# Altium PCB Dev Board.PcbDoc (part 1 of 2)
Units mm, origin at the board's own origin, x right, y up, seen from the top; angles counter-clockwise.
Board outline 100 x 100 mm, 4 copper layers (Top Layer, GND, 3V3, Bottom Layer), stack 0.603 mm thick; 110 components, 66 nets, 337 pads, 152 vias.
Unrouted connection lines stored in the file: 23.
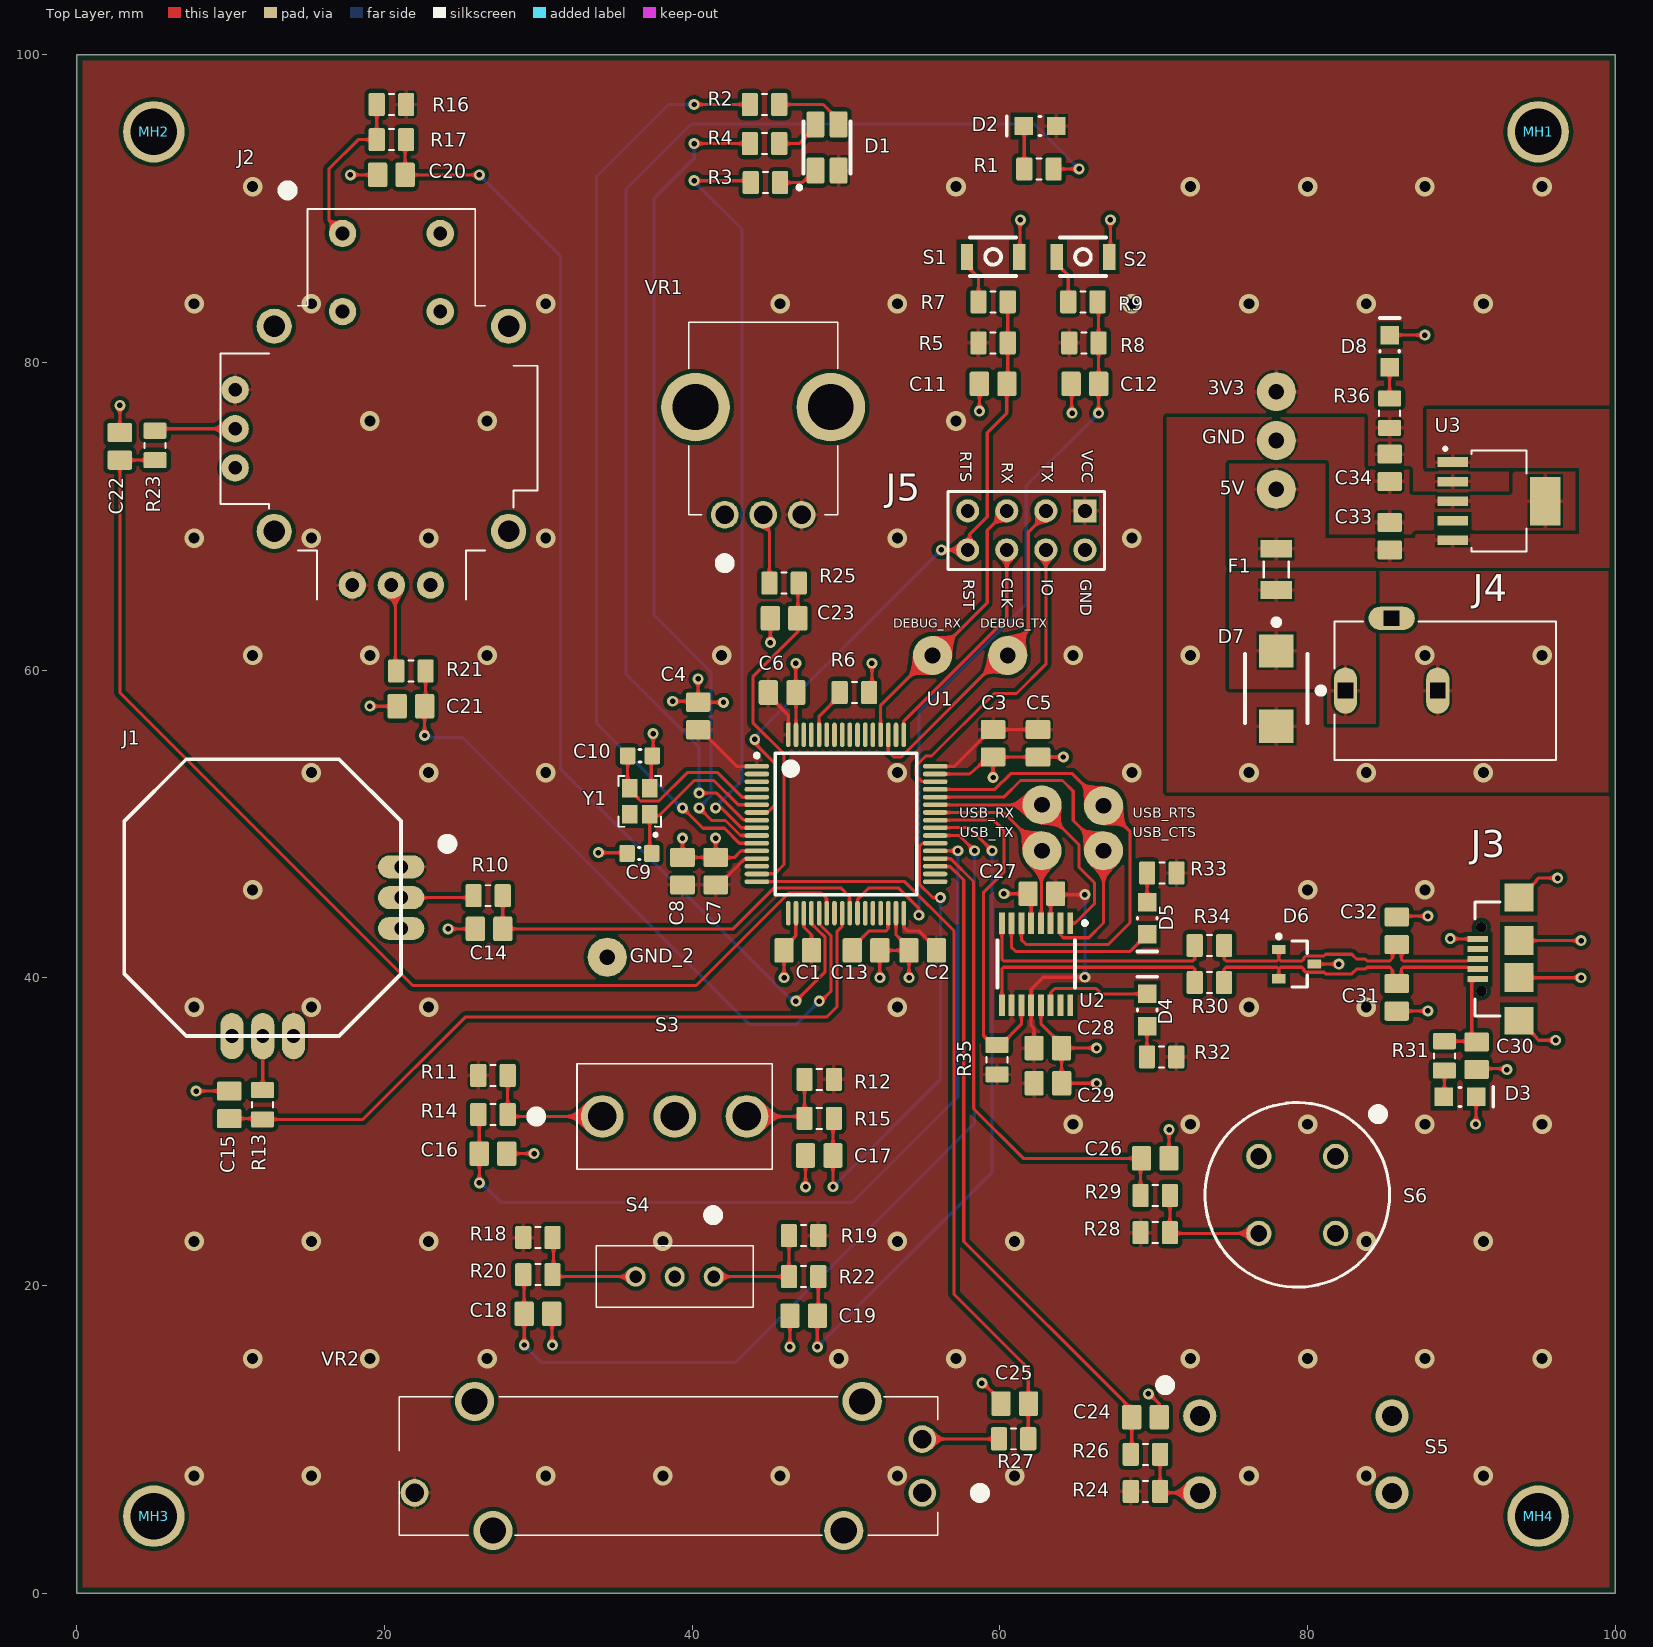
[diagram p0: Top Layer view]
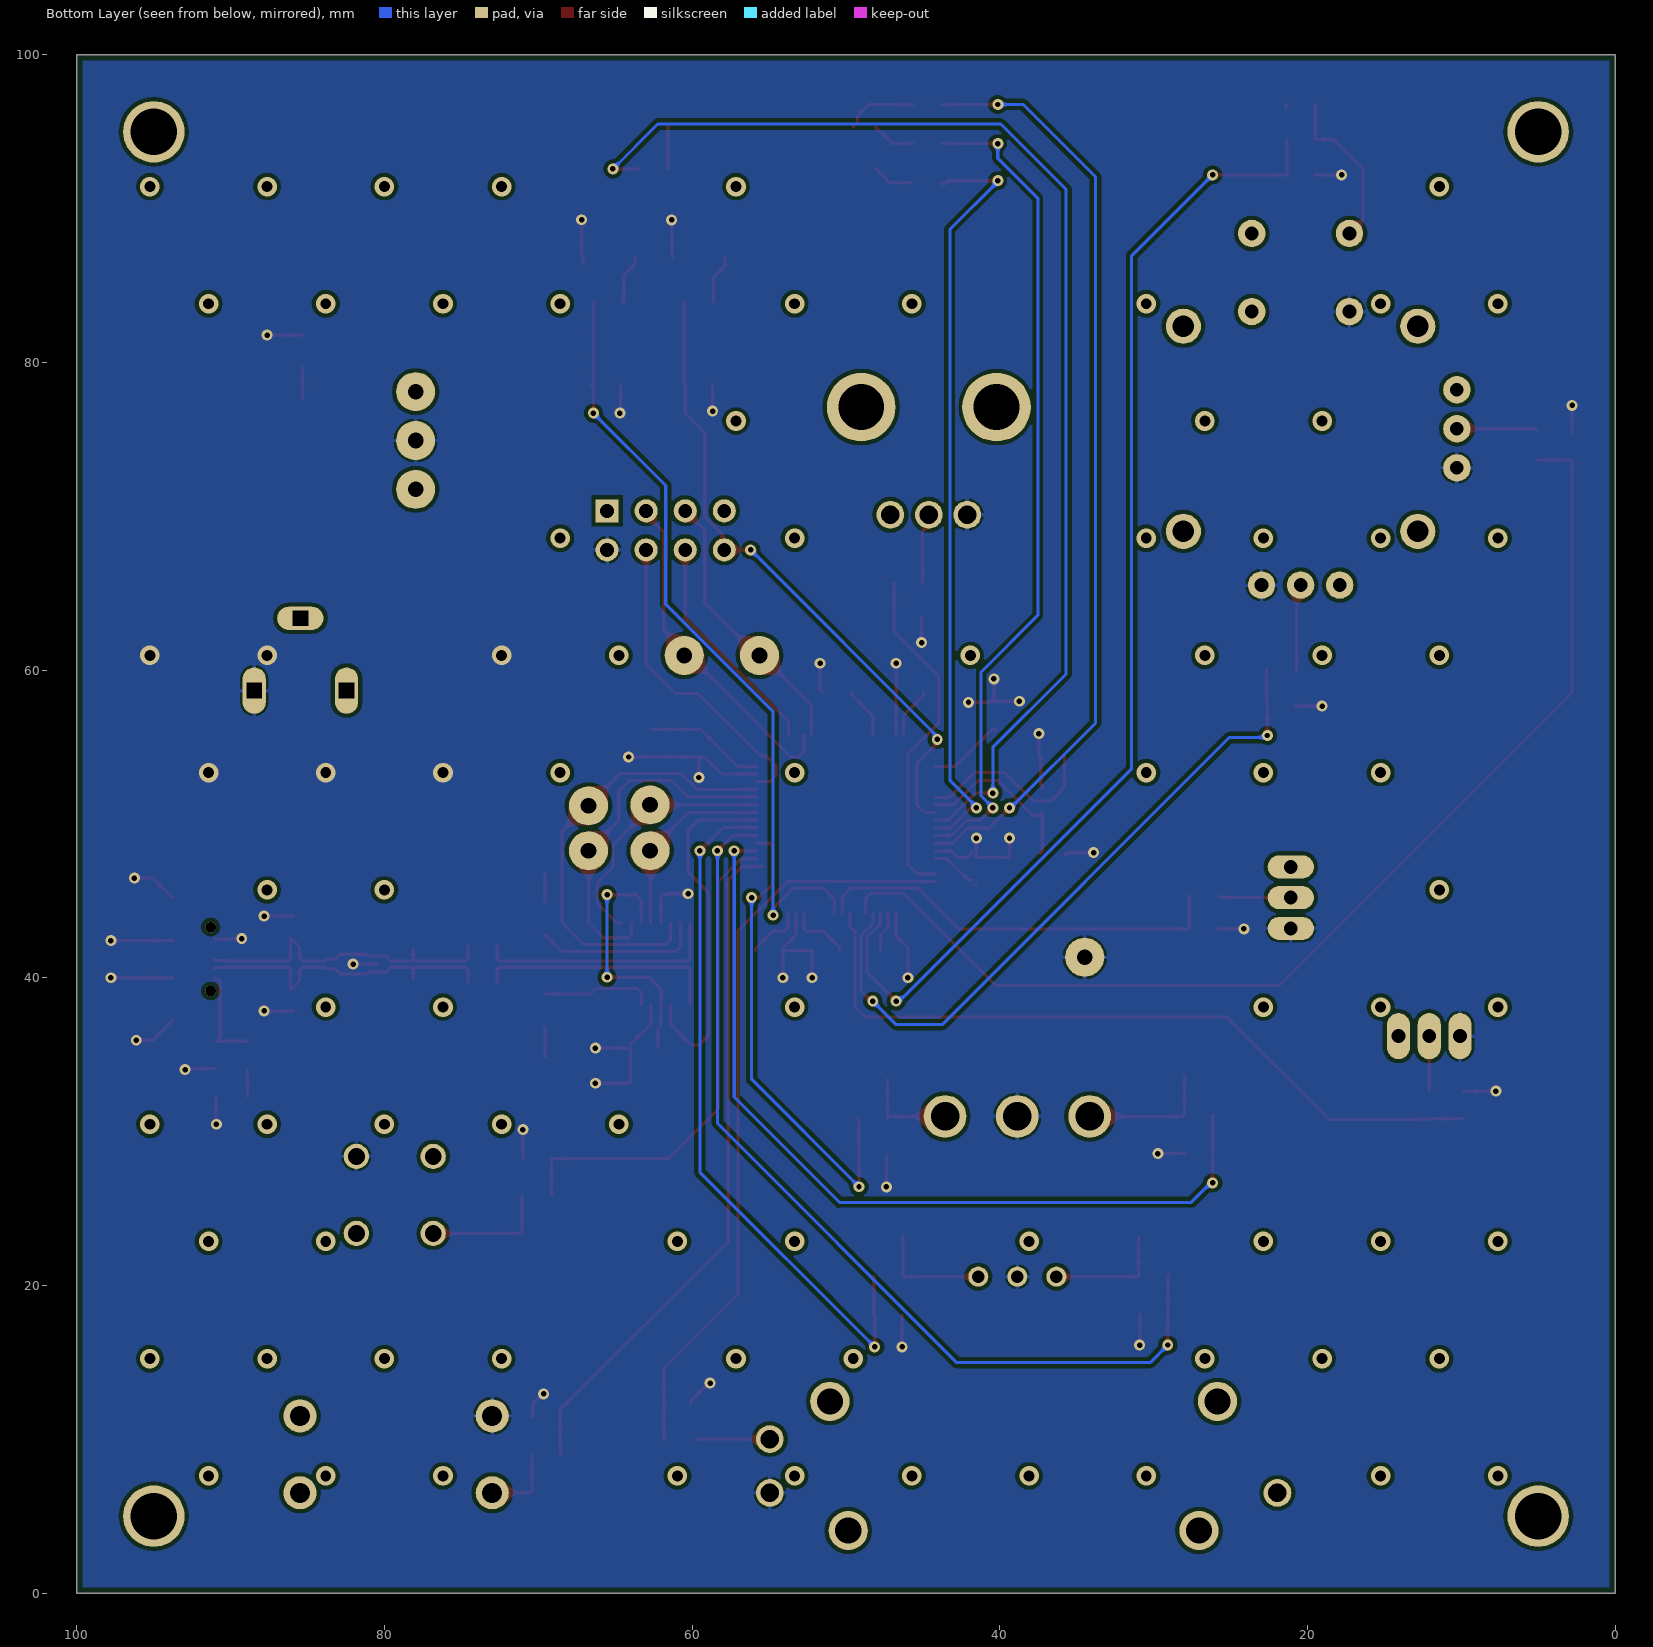
[diagram p1: Bottom Layer view, seen from below]
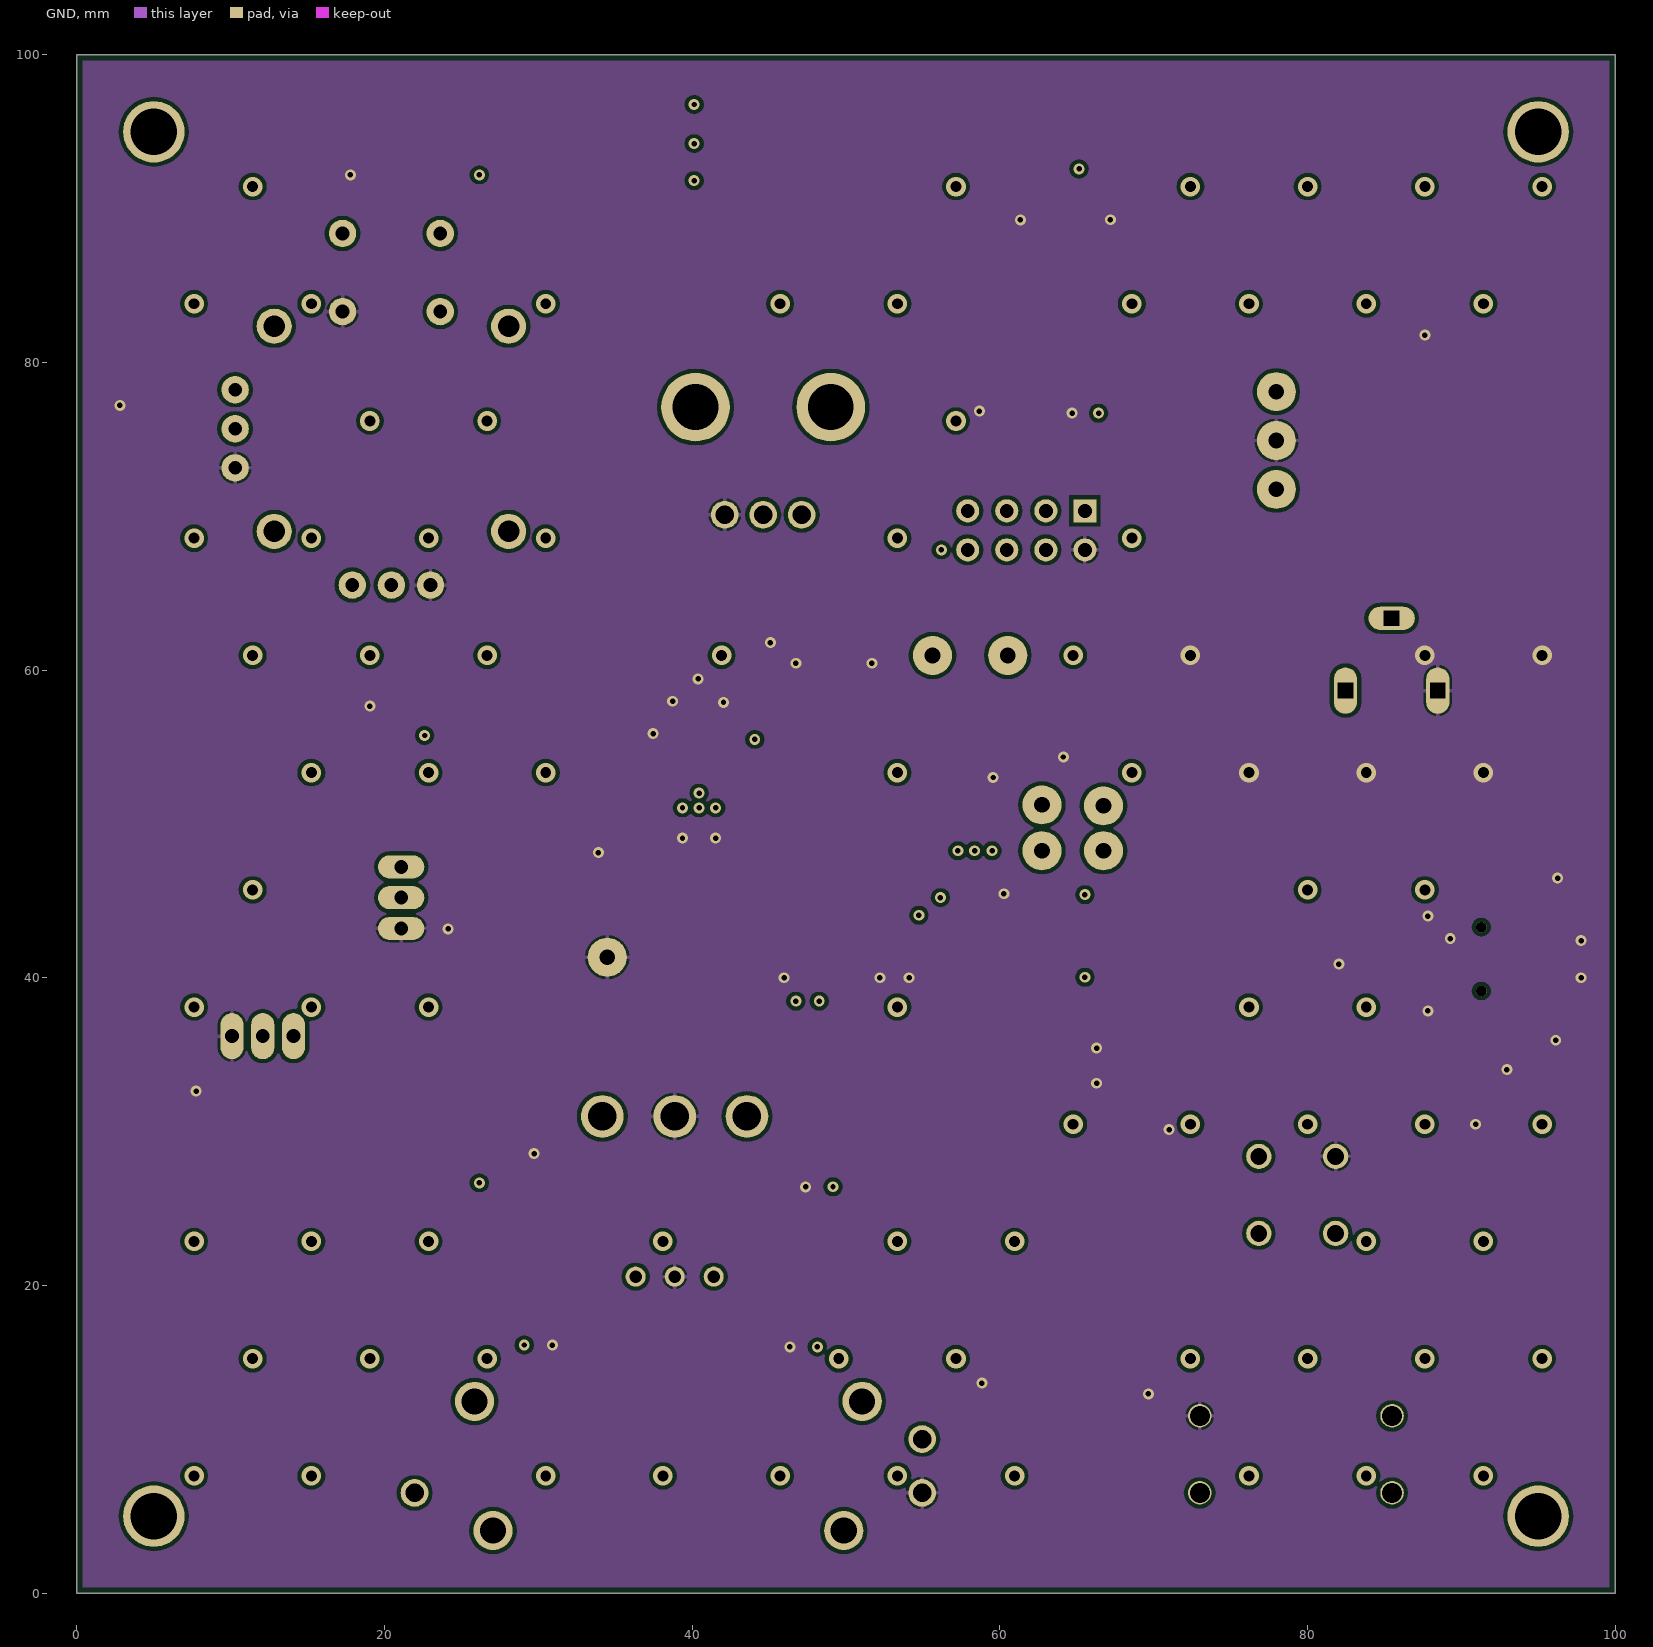
[diagram p2: GND]
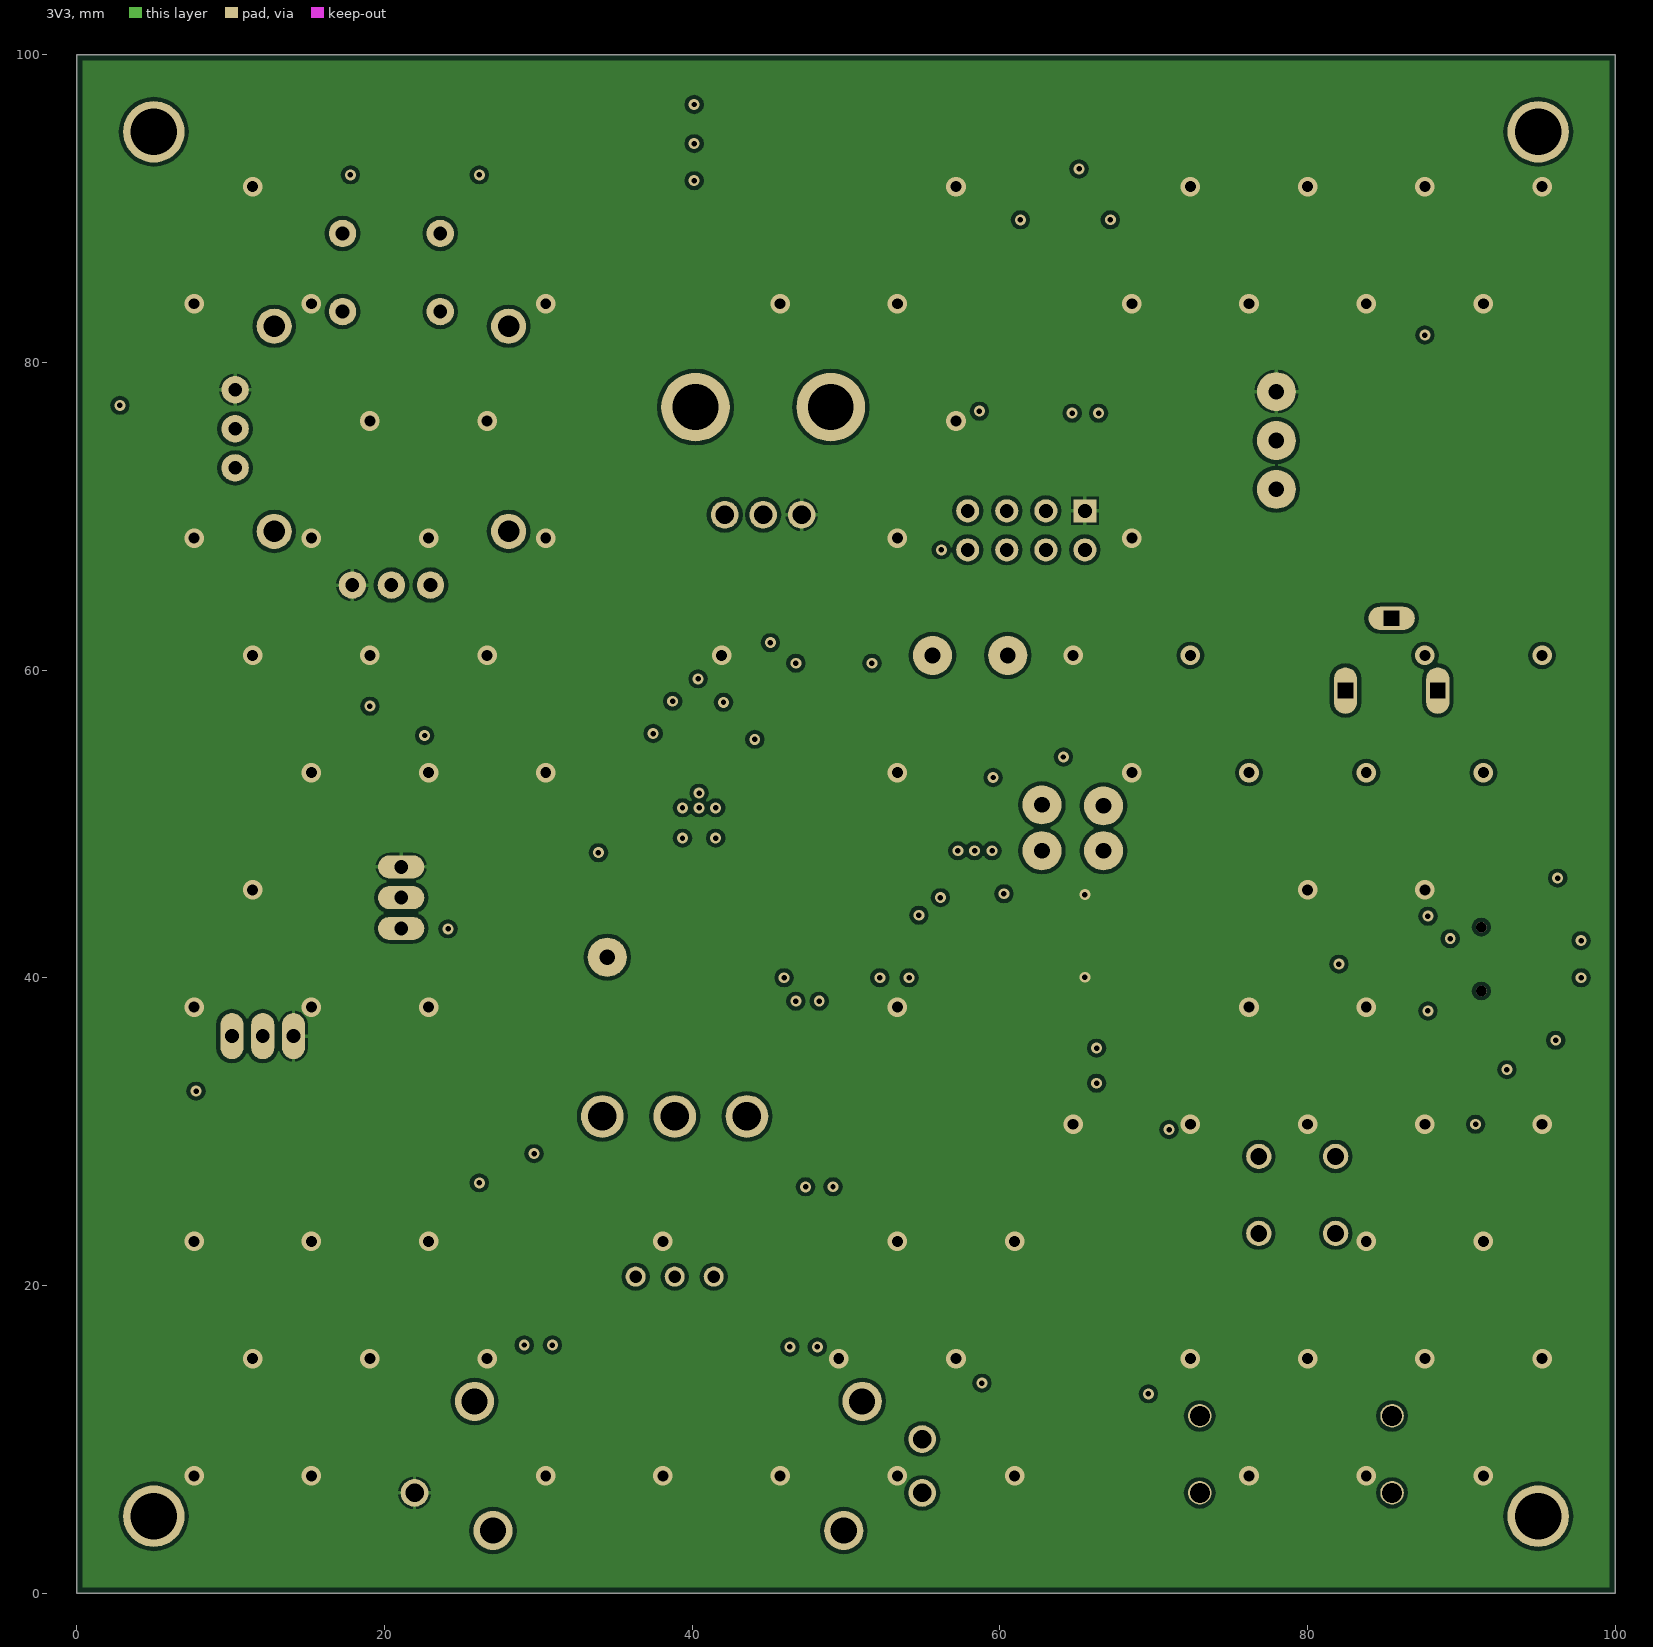
[diagram p3: 3V3]
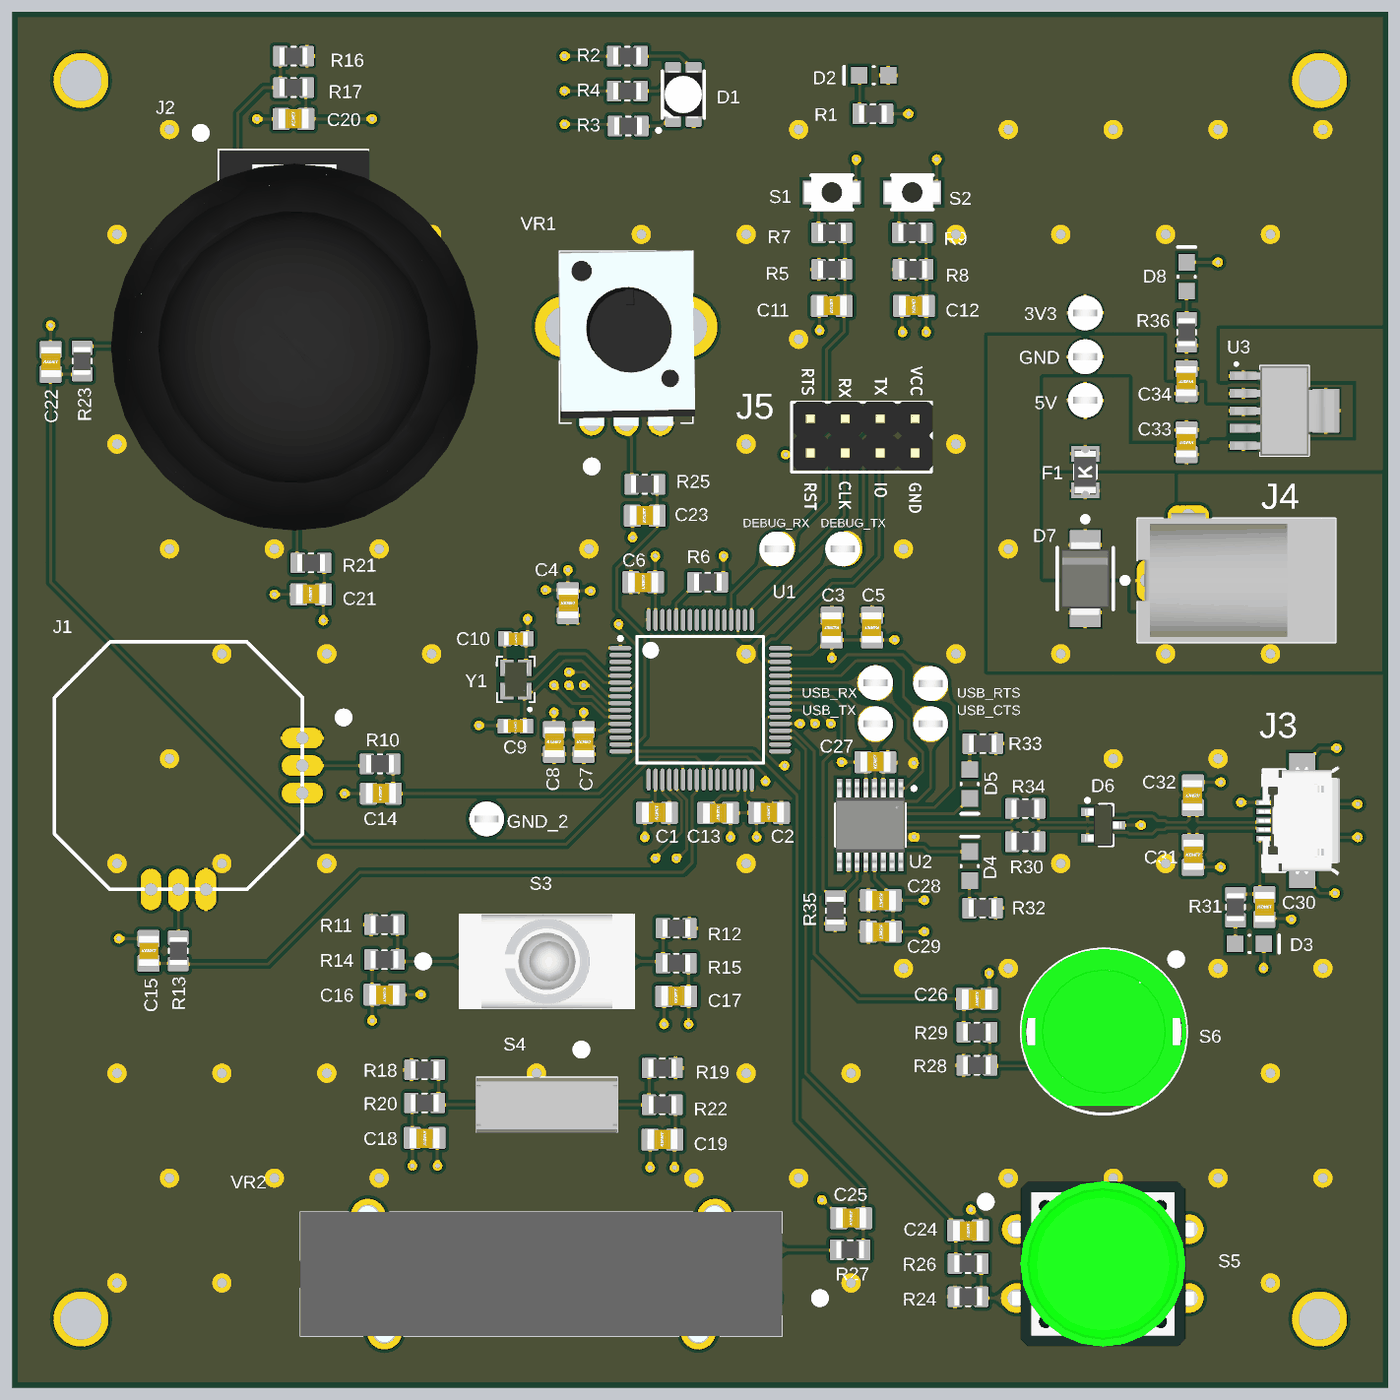
[diagram p4: 3D render of the assembled board from above, using the file's embedded part models]

## Layer stack, top to bottom
Top Solder: solder mask 0.0102, Solder Resist, Dk 3.5
Top Layer: signal copper 0.0356
Dielectric 2: prepreg 0.0711, PP-006, Dk 4.1
GND: signal copper 0.035
Dielectric 1: dielectric 0.32, FR-4, Dk 4.8
3V3: signal copper 0.035
Dielectric 3: prepreg 0.0711, PP-006, Dk 4.1
Bottom Layer: signal copper 0.0356
Bottom Solder: solder mask 0.0102, Solder Resist, Dk 3.5

## Board outline
0,0 100,0 100,100 0,100

## Design rules (kind name [scope] priority, off if disabled: settings)
BoardOutlineClearance [All] p1: gap=0.381 ignorepadtopadclearanceinfootprint=FALSE
Clearance "Clearance Polygons" [InPolygon] p1: gap=0.254 ignorepadtopadclearanceinfootprint=FALSE except(0: Arc-Hole Track-Hole SMDPad-Hole THPad-Hole Via-Hole Fill-Hole Poly-Hole Region-Hole Text-Hole)
Clearance [All] p2: gap=0.127 ignorepadtopadclearanceinfootprint=FALSE except(0: Arc-Hole Track-Hole SMDPad-Hole THPad-Hole Via-Hole Fill-Hole Poly-Hole Region-Hole Text-Hole)
ComponentClearance "HM-TRP & UFL" [InComponent('X1') vs InComponent('U1')] p1: gap=0 collisioncheckmode=3 verticalgap=0 showdistances=FALSE
ComponentClearance [All] p2: gap=0.025 collisioncheckmode=3 verticalgap=0.025 showdistances=FALSE
DiffPairsRouting [All] p1: maxlimit=10 minlimit=0.127 mostfreqgap=0.203 toplayer_minwidth=0.127 toplayer_maxwidth=0.381 toplayer_prefwidth=0.203 midlayer1_minwidth=0.127 midlayer1_maxwidth=0.381 midlayer1_prefwidth=0.203 midlayer2_minwidth=0.127 midlayer2_maxwidth=0.381 midlayer2_prefwidth=0.203 bottomlayer_minwidth=0.127 bottomlayer_maxwidth=0.381 bottomlayer_prefwidth=0.203 maxuncoupledlength=12.7
Height [All] p1: minheight=0 maxheight=52.8 prefheight=12.7
HoleSize [All] p1: absolutevalues=TRUE maxlimit=12.7 minlimit=0.254 maxpercent=80.000 minpercent=20.000
HoleToHoleClearance [All] p1: gap=0.254 allowstackedmicrovias=FALSE
MinimumAnnularRing [All] p1: minimumring=0.102
MinimumSolderMaskSliver [All] p1: minsoldermaskwidth=0
PlaneClearance [All] p1: clearance=0.254
PlaneConnect [All] p1: planeconnectstyle=Relief reliefexpansion=0.102 reliefentries=4 reliefconductorwidth=0.152 reliefairgap=0.152
PolygonConnect "Via connect style" [isVia] p1: connectstyle=Direct reliefconductorwidth=0.254 reliefentries=4 polygonreliefangle="90 Angle" airgapwidth=0.254
PolygonConnect [All] p2: connectstyle=Relief reliefconductorwidth=0.254 reliefentries=4 polygonreliefangle="90 Angle" airgapwidth=0.152
RoutingCorners [All] p1: cornerstyle=45-Degree minsetback=1.25 maxsetback=1.25
RoutingVias [All] p1: holewidth=0.305 width=0.559 viastyle="Through Hole" minholewidth=0.254 minwidth=0.457 maxholewidth=2.54 maxwidth=2.896
SilkToSilkClearance [All] p1: silktosilkclearance=0
SilkToSolderMaskClearance [IsPad] p1: minsilkscreentomaskgap=0.127 clearancetoexposedcopper=TRUE
SolderMaskExpansion [All] p1: expansion=0.064
Width GND [InNet('GND')] p1: maxlimit=10.16 minlimit=0.152 preferedwidth=0.203
Width Power [InNetClass('Power')] p2: maxlimit=1.016 minlimit=0.508 preferedwidth=0.762
Width 3V3 [InNetClass('3V3')] p3: maxlimit=0.762 minlimit=0.254 preferedwidth=0.508
Width [All] p4: maxlimit=10.16 minlimit=0.152 preferedwidth=0.203
19 further rules are at their usual default settings.

## Classes and differential pairs
component class SH4-POWER: 3V3 C33 C34 D7 D8 F1 gnd GND_2 J4 R36 U3
component class SH3-FTDI: C27 C28 C29 C30 C31 C32 D3 D4 D5 D6 J3 R30 R31 R32 R33 R34 R35 U2
component class SH2-CONTROLS: C14 C15 C16 C17 C18 C19 C20 C21 C22 C23 C24 C25 C26 J1 J2 R10 R11 R12 R13 R14 R15 R16 R17 R18 R19 R20 R21 R22 R23 R24 R25 R26 R27 R28 R29 S3 S4 S5 S6 VR1 VR2
component class SH1-MCU: C1 C2 C3 C4 C5 C6 C7 C8 C9 C10 C11 C12 C13 D1 D2 DEBUG_RX DEBUG_TX gnd Gnd J5 MH1 MH2 MH3 MH4 R1 R2 R3 R4 R5 R6 R7 R8 R9 S1 S2 U1 USB_CTS USB_RTS USB_RX USB_TX Y1
differential pair USBD: +USBD_P -USBD_N
differential pair USBD_R: +USBD_R_P -USBD_R_N

## Components (designator, comment, footprint, x,y, rotation, side; value= is the part's Value field where it differs from the comment)
3V3 "TESTPOINT_LOOP" TESTPOINT_LOOP#1 77.978,78.105 r180 top (schematic designator TP4)
5V "TESTPOINT_LOOP" TESTPOINT_LOOP#1 77.978,71.755 r0 top (schematic designator TP3)
C1 "0.1μF" CAPC2012X140N 46.863,41.783 r0 top value=0.1µF
C2 "0.1μF" CAPC2012X140N 54.991,41.783 r0 top value=0.1µF
C3 "0.1μF" CAPC2012X140N 59.563,55.245 r90 top value=0.1µF
C4 "0.1μF" CAPC2012X140N 40.386,57.023 r270 top value=0.1µF
C5 "CAP_4.7uF_16V_0805" CAPC2012X140N 62.484,55.245 r90 top value=4.7µF
C6 "0.1μF" CAPC2012X140N 45.847,58.547 r180 top value=0.1µF
C7 "0.1μF" CAPC2012X140N 41.529,46.932 r270 top value=0.1µF
C8 "CAP_1uF_16V_0805" CAPC2012X140N 39.37,46.932 r270 top value=1uF
C9 "CL10C140JB8NNNC" CAPC0603(1608)55_N 36.568,48.084 r0 top value=14pF
C10 "CL10C140JB8NNNC" CAPC0603(1608)55_N 36.606,54.434 r180 top value=14pF
C11 "CAP_1uF_16V_0805" CAPC2012X140N 59.563,78.613 r0 top value=1uF
C12 "CAP_1uF_16V_0805" CAPC2012X140N 65.532,78.613 r0 top value=1uF
C13 "CAP_4.7uF_16V_0805" CAPC2012X140N 51.302,41.783 r180 top value=4.7µF
C14 "CAP_1uF_16V_0805" CAPC2012X140N 26.797,43.18 r0 top value=1uF
C15 "CAP_1uF_16V_0805" CAPC2012X140N 9.906,31.744 r270 top value=1uF
C16 "CAP_1uF_16V_0805" CAPC2012X140N 27.051,28.575 r180 top value=1uF
C17 "CAP_1uF_16V_0805" CAPC2012X140N 48.26,28.448 r0 top value=1uF
C18 "CAP_1uF_16V_0805" CAPC2012X140N 29.972,18.161 r180 top value=1uF
C19 "CAP_1uF_16V_0805" CAPC2012X140N 47.25,18.034 r0 top value=1uF
C20 "CAP_1uF_16V_0805" CAPC2012X140N 20.447,92.202 r0 top value=1uF
C21 "CAP_1uF_16V_0805" CAPC2012X140N 21.717,57.658 r0 top value=1uF
C22 "CAP_1uF_16V_0805" CAPC2012X140N 2.794,74.549 r270 top value=1uF
C23 "CAP_1uF_16V_0805" CAPC2012X140N 45.974,63.373 r0 top value=1uF
C24 "CAP_1uF_16V_0805" CAPC2012X140N 69.469,11.436 r180 top value=1uF
C25 "CAP_1uF_16V_0805" CAPC2012X140N 60.966,12.319 r0 top value=1uF
C26 "CAP_1uF_16V_0805" CAPC2012X140N 70.104,28.263 r180 top value=1uF
C27 "0.1μF" CAPC2012X140N 62.732,45.466 r0 top value=0.1µF
C28 "0.1μF" CAPC2012X140N 63.119,35.433 r180 top value=0.1µF
C29 "" CAPC2012X140N 63.125,33.147 r180 top value=4.7µF
C30 "" CAPC2012X140N 90.995,34.931 r270 top
C31 "" CAPC2012X140N 85.8,38.729 r270 top
C32 "" CAPC2012X140N 85.8,43.059 r90 top
C33 "" CAPC2012X140N 85.344,68.713 r90 top
C34 "" CAPC2012X140N 85.344,73.158 r90 top
D1 "LED_RGB" LED_RGB 48.768,93.98 r0 top
D2 "LG R971-KN-1" LED_0805_LINE 62.611,95.377 r180 top
D3 "LS R976-NR-1" LED_0805_LINE 89.916,32.258 r0 top
D4 "LG R971-KN-1" LED_0805_LINE 69.58,37.908 r90 top
D5 "LY R976-PS-36" LED_0805_LINE 69.58,43.877 r270 top
D6 "TVS_DIODE_USB_5.5V" SOT23-3 79.288,40.89 r0 top
D7 "TVS_DIODE_UNIDIR_5V" TVS_DIODE_BIDIRECTIONAL 77.978,58.801 r270 top
D8 "LG R971-KN-1" LED_0805_LINE 85.344,80.738 r90 top
DEBUG_RX "TESTPOINT_LOOP" TESTPOINT_LOOP#2 55.562,60.96 r0 top (schematic designator TP2)
DEBUG_TX "TESTPOINT_LOOP" TESTPOINT_LOOP#3 60.349,60.96 r0 top (schematic designator TP1)
F1 "FUSE_1.25A_1206" FUSE_1206 77.978,66.548 r90 top
GND "TESTPOINT_LOOP" TESTPOINT_LOOP#1 77.978,74.93 r0 top (schematic designator TP5)
GND_2 "TESTPOINT_LOOP" TESTPOINT_LOOP#1 34.48,41.338 r180 top (schematic designator TP8)
J1 "2_AXIS_JOYSTICK_SMALL" 2_AXIS_JOY_SMALL 12.082,45.212 r0 top
J2 "2_AXIS_JOYSTICK" 2_AXIS_JOY 20.447,75.692 r0 top
J3 "629105136821" 629105136821 93.75,41.217 r90 top
J4 "PJ-102B" CUI_PJ-102B 88.971,58.673 r0 top
J5 "HEADER 4X2" HEADER_2X4 65.532,70.358 r180 top
MH1 "MOUNTING_HOLES" MOUNTING_HOLE#1 97.028,96.52 r0 top
MH2 "MOUNTING_HOLES" MOUNTING_HOLE#2 2.921,96.774 r0 top
MH3 "MOUNTING_HOLES" MOUNTING_HOLE#3 2.54,2.667 r0 top
MH4 "MOUNTING_HOLES" MOUNTING_HOLE#4 97.409,2.794 r0 top
R1 "RES_100Ω_0805" RESC2012X60N 62.545,92.583 r180 top value=100O
R2 "RES_20Ω_0805" RESC2012X60N 44.704,96.774 r180 top value=20O
R3 "RES_100Ω_0805" RESC2012X60N 44.765,91.694 r0 top value=100O
R4 "RES_20Ω_0805" RESC2012X60N 44.704,94.234 r180 top value=20O
R5 "RES_10kΩ_0805" RESC2012X60N 59.563,81.28 r180 top value=10kO
R6 "RES_10kΩ_0805" RESC2012X60N 50.546,58.547 r0 top value=10kO
R7 "RES_10kΩ_0805" RESC2012X60N 59.563,83.947 r0 top value=10kO
R8 "RES_10kΩ_0805" RESC2012X60N 65.466,81.28 r180 top value=10kO
R9 "RES_10kΩ_0805" RESC2012X60N 65.405,83.947 r180 top value=10kO
R10 "RES_10kΩ_0805" RESC2012X60N 26.731,45.339 r0 top value=10kO
R11 "RES_10kΩ_0805" RESC2012X60N 27.051,33.655 r0 top value=10kO
R12 "RES_10kΩ_0805" RESC2012X60N 48.26,33.401 r180 top value=10kO
R13 "RES_10kΩ_0805" RESC2012X60N 12.065,31.75 r270 top value=10kO
R14 "RES_10kΩ_0805" RESC2012X60N 27.051,31.115 r180 top value=10kO
R15 "RES_10kΩ_0805" RESC2012X60N 48.26,30.861 r0 top value=10kO
R16 "RES_10kΩ_0805" RESC2012X60N 20.447,96.774 r180 top value=10kO
R17 "RES_10kΩ_0805" RESC2012X60N 20.447,94.488 r0 top value=10kO
R18 "RES_10kΩ_0805" RESC2012X60N 29.972,23.114 r0 top value=10kO
R19 "RES_10kΩ_0805" RESC2012X60N 47.244,23.241 r180 top value=10kO
R20 "RES_10kΩ_0805" RESC2012X60N 29.972,20.701 r180 top value=10kO
R21 "RES_10kΩ_0805" RESC2012X60N 21.717,59.944 r0 top value=10kO
R22 "RES_10kΩ_0805" RESC2012X60N 47.244,20.574 r0 top value=10kO
R23 "RES_10kΩ_0805" RESC2012X60N 5.08,74.615 r270 top value=10kO
R24 "RES_10kΩ_0805" RESC2012X60N 69.469,6.61 r0 top value=10kO
R25 "RES_10kΩ_0805" RESC2012X60N 45.974,65.659 r0 top value=10kO
R26 "RES_10kΩ_0805" RESC2012X60N 69.469,9.023 r180 top value=10kO
R27 "RES_10kΩ_0805" RESC2012X60N 60.894,10.033 r0 top value=10kO
R28 "RES_10kΩ_0805" RESC2012X60N 70.104,23.437 r0 top value=10kO
R29 "RES_10kΩ_0805" RESC2012X60N 70.104,25.85 r180 top value=10kO
R30 "RES_27Ω_0805" RESC2012X60N 73.625,39.686 r180 top
R31 "1kΩ" RESC2012X60N 88.9,34.925 r90 top value=1kO
R32 "1kΩ" RESC2012X60N 70.516,34.86 r0 top value=1kO
R33 "1kΩ" RESC2012X60N 70.533,46.812 r0 top value=1kO
R34 "RES_27Ω_0805" RESC2012X60N 73.625,42.099 r180 top
R35 "RES_10kΩ_0805" RESC2012X60N 59.817,34.671 r270 top value=10kO
R36 "120" RESC2012X60N 85.344,76.708 r270 top
S1 "SW_TACTILE" B3U-1000P 59.563,86.868 r0 top
S2 "SW_TACTILE" B3U-1000P 65.405,86.868 r0 top
S3 "SW_SPDT" 100SP1T1B4M2QE 38.862,30.988 r0 top
S4 "SW_SPDT_SMALL" SS12SDP2 38.862,20.574 r270 top
S5 "Pushbutton" TACTILE_SWITCH_PTH_12MM 79.248,9.023 r180 top
S6 "MOMENTARY_SWITCH_D6R" D6R 79.335,25.89 r90 top
U1 "STM32F446RET6" STM-LQFP64_L 50,50 r0 top
U2 "IC_USB_TRANSCEIVER" SSOP16-0.635-5X4MM 62.352,40.893 r180 top
U3 "TPS73733DCQR" SOT-223-6 92.456,70.993 r0 top
USB_CTS "TESTPOINT_LOOP" TESTPOINT_LOOP#1 66.739,48.26 r0 top (schematic designator TP9)
USB_RTS "TESTPOINT_LOOP" TESTPOINT_LOOP#1 66.739,51.181 r180 top (schematic designator TP10)
USB_RX "TESTPOINT_LOOP" TESTPOINT_LOOP#1 62.738,51.244 r0 top (schematic designator TP7)
USB_TX "TESTPOINT_LOOP" TESTPOINT_LOOP#1 62.738,48.26 r0 top (schematic designator TP6)
VR1 "POT_10K" PTV09A4020FB103 44.617,75.704 r0 top
VR2 "POT_10K_SLIDE" PTA20432015CPB103 54.951,6.514 r180 top
Y1 "CRYSTAL_25MHZ" SOIC254P1016X440-4N 36.591,51.474 r90 top

## Footprints (in the part's own frame and the unit in brackets; to place one, negate y for a bottom-side part, rotate by r counter-clockwise, add the part's x,y. Pads: shape width x height; smd on the part's side, far side on the other; paste and mask are expansions set on the pad)
2_AXIS_JOY [mil]
  round 70 hole 35.43: B1A(-125,500) B1B(125,500) B2A(-125,300) B2B(125,300)
  round 70 hole 35: H1(-100,-400) H2(0,-400) H3(100,-400) V1(-400,100) V2(-400,0) V3(-400,-100)
  round 90 hole 55: S1(-300,262.5) S2(-300,-262.5) S3(300,-262.5) S4(300,262.5)
  silkscreen extent -437,-437 374,622, body extent -522,-527 528,560, height 1190
2_AXIS_JOY_SMALL [mm]
  oval 3x1.5 hole 0.9: 1(9,2) 2(9,0) 3(9,-2)
  oval 1.5x3 hole 0.9: 4(2,-9) 5(0,-9) 6(-2,-9)
  silkscreen extent -9,-9 12.3,9
100SP1T1B4M2QE [mm]
  round 2.775 hole 1.85: 1(-4.7,0) 2(0,0) 3(4.7,0)
  silkscreen extent -9.3,-3.43 6.35,3.43, body extent -6.35,-3.43 6.35,3.43, height 29.63
629105136821 [mm] "Micro USB 2.0 SMT Type B Horizontal 5 Contacts"
  rect 0.4x1.35 smd: 1(-1.3,2.675) 2(-0.65,2.675) 3(0,2.675) 4(0.65,2.675) 5(1.3,2.675)
  round 0.7 hole 0.7 unplated: MH1(-2.075,2.45) MH2(2.075,2.45)
  rect 1.8x1.9 smd: Shell(-4,0) Shell(4,0)
  rect 1.9x1.9 smd: Shell(-1.2,0) Shell(1.2,0)
  silkscreen extent -3.7,1.25 3.7,2.85, body extent -4,-2.73 4,3.17, height 2.69
B3U-1000P [mm] "TACTILE SWITCH GREY"
  rect 0.8x1.7 smd: 1(-1.7,0) 2(1.7,0)
  silkscreen extent -1.5,-1.25 1.5,1.25, body extent -2,-1.25 2,1.25, height 1.6
CAPC0603(1608)55_N [mm] "Chip Capacitor, Body 1.6x0.8mm, Height 0.55mm, IPC Medium Density"
  rrect20% 1x1.1 smd: 1(-0.8,0) 2(0.8,0)
  silkscreen extent -0.05,-0.4 0.05,0.4, body extent -0.87,-0.48 0.88,0.48, height 0.87
CAPC2012X140N [mm]
  rrect20% 1.25x1.6 smd: 1(-0.895,0) 2(0.895,0)
  body extent -1.1,-0.7 1.1,0.75, height 1.41
CUI_PJ-102B [mm]
  oval 1.508x3.016 hole 1 square: 1(-6.5,0) 2(-0.5,0)
  oval 3.016x1.508 hole 1 square: 3(-3.5,4.7)
  silkscreen extent -8.3,-4.5 7.2,4.5, body extent -7.2,-4.5 7.2,4.9, height 11.5
D6R [mm]
  round 1.64 hole 1.1: 1(2.5,-2.5) 2(-2.5,-2.5) 3(-2.5,2.5) 4(2.5,2.5)
  silkscreen extent -6,-6 6,6, body extent -5.4,-6 6,6, height 12.8
FUSE_1206 [mil]
  rect 45x80 smd mask+1: 1(-52.5,0) 2(52.5,0)
  silkscreen extent -20,-32 20,32, body extent -65,-32 65,32, height 32
HEADER_2X4 [mm]
  rect 1.5x1.5 hole 0.9: 1(0,0)
  round 1.5 hole 0.9: 2(2.54,0) 3(5.08,0) 4(7.62,0) 5(0,2.54) 6(2.54,2.54) 7(5.08,2.54) 8(7.62,2.54)
  silkscreen extent -1.27,-1.27 8.89,3.81, body extent -1.36,-1.32 8.8,3.67, height 8.54
LED_0805_LINE [mm] "SMD, 2-Leads, Body 2x1.25mm"
  rect 1.2x1.2 smd: 1(-1.05,0) 2(1.05,0)
  silkscreen extent -0.05,-0.63 2.16,0.64, body extent -1,-0.63 1,0.63, height 0.8
LED_RGB [mm]
  rrect20% 1.15x1.7 smd: 1(-0.75,-1.5) 2(-0.75,1.5) 3(0.75,1.5) 4(0.75,-1.5)
  silkscreen extent -1.92,-2.72 1.53,1.7, body extent -1.4,-1.75 1.4,1.75, height 1.89
MOUNTING_HOLE#1 [mm]
  round 4 hole 3 unplated: 0(-2.028,-1.52)
MOUNTING_HOLE#2 [mm]
  round 4 hole 3 unplated: 0(2.079,-1.774)
MOUNTING_HOLE#3 [mm]
  round 4 hole 3 unplated: 0(2.46,2.333)
MOUNTING_HOLE#4 [mm]
  round 4 hole 3 unplated: 0(-2.409,2.206)
PTA20432015CPB103 [mm]
  round 1.8 hole 1.2: 1(0,0) 2(0,-3.5) 3(33,0)
  round 2.55 hole 1.7: 4(3.9,-5.95) 5(5.1,2.45) 6(27.9,2.45) 7(29.1,-5.95)
  silkscreen extent -4.05,-6.25 34,2.75, body extent -1,-6.7 34,3.2, height 6.6
PTV09A4020FB103 [mm]
  round 1.8 hole 1.2: 1(-2.5,-5.6) 2(0,-5.6) 3(2.5,-5.6)
  round 4.46 hole 2.973: 4(-4.4,1.4) 5(4.4,1.4)
  silkscreen extent -4.85,-9.05 4.85,6.9, body extent -4.95,-5.8 5.02,6.97, height 20.09
RESC2012X60N [mm]
  rrect20% 1.05x1.5 smd: 1(-0.955,0) 2(0.955,0)
  silkscreen extent -0.17,-0.68 0.17,0.68, body extent -1,-0.62 1,0.62, height 0.6
SOIC254P1016X440-4N [mm]
  rect 1.2x1 smd: 1(-0.85,-0.65) 2(0.85,-0.65) 3(0.85,0.65) 4(-0.85,0.65)
  silkscreen extent -2.27,-1.37 1.65,1.37, body extent -1.24,-0.85 1.24,0.85, height 0.56
SOT23-3 [mm] "SOT23, 3-Leads, Body 2.90x2.30mm, Pitch 0.95mm, IPC Medium Density"
  rect 0.9x0.6 smd: 1(-1.15,0.95) 2(-1.15,-0.95) 3(1.15,0)
  silkscreen extent -1.27,-1.5 0.7,1.92, body extent -1.3,-1.5 1.3,1.5, height 1.1
SOT-223-6 [mm]
  rect 1.97x0.62 smd: 1(-3.005,2.54) 2(-3.005,1.27) 3(-3.005,0) 4(-3.005,-1.27) 5(-3.005,-2.54)
  rect 1.97x3.16 smd: 6(3.005,0)
  silkscreen extent -3.6,-3.28 1.78,3.5, body extent -3.63,-3.28 3.63,3.27, height 1.8
SS12SDP2 [mm]
  round 1.3 hole 0.8: 1(0,2.54) 2(0,0) 3(0,-2.54)
  silkscreen extent -4.3,-5.1 2,5.1, body extent -1.96,-5.11 2.03,5.11, height 6.35
SSOP16-0.635-5X4MM [mil]
  rect 15x55 smd: 1(-87.5,-105) 2(-62.5,-105) 3(-37.5,-105) 4(-12.5,-105) 5(12.5,-105) 6(37.5,-105) 7(62.5,-105) 8(87.5,-105) 9(87.5,105) 10(62.5,105) 11(37.5,105) 12(12.5,105) 13(-12.5,105) 14(-37.5,105) 15(-62.5,105) 16(-87.5,105)
  silkscreen extent -130,-110 98,60, body extent -99,-122 98,122, height 69
STM-LQFP64_L [mm] "QFP, 64-Leads, Body 10x10mm, Pitch 0.5mm, IPC High Density"
  oval 1.6x0.3 smd: 1(-5.8,3.75) 2(-5.8,3.25) 3(-5.8,2.75) 4(-5.8,2.25) 5(-5.8,1.75) 6(-5.8,1.25) 7(-5.8,0.75) 8(-5.8,0.25) 9(-5.8,-0.25) 10(-5.8,-0.75) 11(-5.8,-1.25) 12(-5.8,-1.75) 13(-5.8,-2.25) 14(-5.8,-2.75) 15(-5.8,-3.25) 16(-5.8,-3.75) 33(5.8,-3.75) 34(5.8,-3.25) 35(5.8,-2.75) 36(5.8,-2.25) 37(5.8,-1.75) 38(5.8,-1.25) 39(5.8,-0.75) 40(5.8,-0.25) 41(5.8,0.25) 42(5.8,0.75) 43(5.8,1.25) 44(5.8,1.75) 45(5.8,2.25) 46(5.8,2.75) 47(5.8,3.25) 48(5.8,3.75)
  oval 0.3x1.6 smd: 17(-3.75,-5.8) 18(-3.25,-5.8) 19(-2.75,-5.8) 20(-2.25,-5.8) 21(-1.75,-5.8) 22(-1.25,-5.8) 23(-0.75,-5.8) 24(-0.25,-5.8) 25(0.25,-5.8) 26(0.75,-5.8) 27(1.25,-5.8) 28(1.75,-5.8) 29(2.25,-5.8) 30(2.75,-5.8) 31(3.25,-5.8) 32(3.75,-5.8) 49(3.75,5.8) 50(3.25,5.8) 51(2.75,5.8) 52(2.25,5.8) 53(1.75,5.8) 54(1.25,5.8) 55(0.75,5.8) 56(0.25,5.8) 57(-0.25,5.8) 58(-0.75,5.8) 59(-1.25,5.8) 60(-1.75,5.8) 61(-2.25,5.8) 62(-2.75,5.8) 63(-3.25,5.8) 64(-3.75,5.8)
  silkscreen extent -5.92,-4.6 4.6,4.6, body extent -5,-5 5,5, height 1.6
TACTILE_SWITCH_PTH_12MM [mil]
  round 85 / inner round 60 / far side round 85 hole 51.18: 1(246.06,-98.43) 2(-246.06,-98.43) 3(246.06,98.43) 4(-246.06,98.43)
  silkscreen extent 323,-189 346,-165, body extent -274,-235 272,237, height 374
TESTPOINT_LOOP#1 [mm]
  round 2.54 hole 1.02: 1(0,0)
  body extent -1.27,-1.27 1.27,1.27, height 4.57
TESTPOINT_LOOP#2 [mm]
  round 2.54 hole 1.02: 1(0.064,0)
  body extent -1.27,-1.27 1.27,1.27, height 4.57
TESTPOINT_LOOP#3 [mm]
  round 2.54 hole 1.02: 1(0.167,0)
  body extent -1.27,-1.27 1.27,1.27, height 4.57
TVS_DIODE_BIDIRECTIONAL [mm]
  rect 2.16x2.26 smd: 1(-2.45,0) 2(2.45,0)
  silkscreen extent -4.5,-2.03 2.25,2.03, body extent -2.7,-1.8 2.7,1.8, height 2.27

## Part data
3V3 5V DEBUG_RX DEBUG_TX GND GND_2 USB_CTS USB_RTS USB_RX USB_TX: "Loop testpoint through-hole pad", Manufacturer 1="Keystone Electronics", Manufacturer Part Number 1=5002, Supplier Part Number 1=36-5002-ND, Mount="Through Hole", Supplier 1=Digi-Key
C1 C2 C3 C4 C6 C7 C27 C28: library part CAP_0.1uF_50V_0805, "CAP CER 0.1UF 50V X7R 0805", Case Code (Imperial)=0805, Case Code (Metric)=2012, Dielectric=X7R, Manufacturer 1="Murata Electronics", Manufacturer Part Number 1=GCD21BR71H104KA01L, Max Operating Temperature=125°C, Min Operating Temperature=-55°C, Package="0805 (2012 Metric)", Ratings=AEC-Q200, Supplier Part Number 1=490-11955-1-ND, Tolerance=10%, Voltage Rating=50V, Depth=1.25mm, Height=1.25mm, Length=2mm, Mount="Surface Mount", Supplier 1=Digi-Key, Termination=SMD/SMT, Thickness=0.049inch, Width=0.049inch
  C1 C2 C3 C4 C6 C7: ComponentLink1Description=https://datasheet.ciiva.com/29537/c03e-29537701.pdf?src-supplier=Digi-Key, ComponentLink1URL=https://datasheet.ciiva.com/29537/c03e-29537701.pdf?src-supplier=Digi-Key
C5 C13: "CAP CER 4.7UF 16V X5R 0805", Case Code (Imperial)=0805, Case Code (Metric)=2012, Dielectric=X5R, Manufacturer 1="Samsung Electro-Mechanics", Manufacturer Part Number 1=CL21A475KOFNNNE, Max Operating Temperature=85°C, Min Operating Temperature=-55°C, Package="0805 (2012 Metric)", Supplier Part Number 1=1276-1065-1-ND, Tolerance=10%, Voltage Rating=16V, Mount="Surface Mount", Supplier 1=Digi-Key, Termination=SMD/SMT
C8 C11 C12 C14 C15 C16 C17 C18 C19 C20 C21 C22 C23 C24 C25 C26: "CAP CER 1UF 16V X7R 0805", Case Code (Imperial)=0805, Case Code (Metric)=2012, Dielectric=X7R, Manufacturer 1=Yageo, Manufacturer Part Number 1=CC0805KKX7R7BB105, Max Operating Temperature=125°C, Min Operating Temperature=-55°C, Package="0805 (2012 Metric)", Supplier Part Number 1=311-1365-1-ND, Tolerance=10%, Voltage Rating=16V, Mount="Surface Mount", Supplier 1=Digi-Key, Termination=SMD/SMT
C9 C10: "Cap Ceramic 14pF 50V C0G 5% SMD 0603 125C Cardboard T/R", Capacitance=14pF, Case/Package=0603, Case Code (Metric)=1608, Dielectric=C0G, Manufacturer 1=Samsung, Max Operating Temperature=125°C, Min Operating Temperature=-55°C, Package Quantity=1, Supplier Part Number 1=1276-2187-1-ND, Tolerance=5%, Voltage Rating=50V, Case Code (Imperial)=0603, ComponentLink1Description=https://datasheet.ciiva.com/25782/cl10c140jb8nnnc-25782947.pdf?src-supplier=Digi-Key, ComponentLink1URL=https://datasheet.ciiva.com/25782/cl10c140jb8nnnc-25782947.pdf?src-supplier=Digi-Key, Depth=0.8mm, Height=0.8mm, Length=1.6mm, Manufacturer Part Number 1=CL10C140JB8NNNC, Mount="Surface Mount", Packaging="Tape and Reel", Pricing 1="1=0.10000, 10=0.06700, 100=0.02980, 500=0.02130, 1000=0.01673 (USD)", Radiation Hardening=No, RoHS=Yes, Stock 1=187088, Supplier 1=Digi-Key, Thickness=0.035inch, Voltage Rating (DC)=50V, Width=0.031inch
C29: library part CAP_4.7uF_16V_0805, "CAP CER 4.7UF 16V X5R 0805", Case Code (Imperial)=0805, Case Code (Metric)=2012, Dielectric=X5R, Manufacturer 1="Samsung Electro-Mechanics", Manufacturer Part Number 1=CL21A475KOFNNNE, Max Operating Temperature=85°C, Min Operating Temperature=-55°C, Package="0805 (2012 Metric)", Supplier Part Number 1=1276-1065-1-ND, Tolerance=10%, Voltage Rating=16V, Mount="Surface Mount", Supplier 1=Digi-Key, Termination=SMD/SMT
C30: library part CAP_10nF_16V_0805, "CAP CER 10000PF 16V X7R 0805", Capacitance=10nF, Case/Package=0805, Case Code (Metric)=2012, Manufacturer 1=Yageo, Manufacturer Part Number 1=AC0805KRX7R7BB103, Max Operating Temperature=125°C, Min Operating Temperature=-55°C, Ratings=AEC-Q200, Supplier Part Number 1=311-3161-1-ND, Tolerance=10%, Voltage Rating=16V, Case Code (Imperial)=0805, ComponentLink1Description=http://www.yageo.com/NewPortal/_en/search/productDocs.jsp?YageoPartNumber=AC0805KRX7R7BB103&src-supplier=Digi-Key, ComponentLink1URL=http://www.yageo.com/NewPortal/_en/search/productDocs.jsp?YageoPartNumber=AC0805KRX7R7BB103&src-supplier=Digi-Key, Mount="Surface Mount", Packaging="Cut Tape", Pricing 1="1=0.20000, 10=0.13900, 100=0.07060, 500=0.04832, 1000=0.04275 (USD)", RoHS=No, Stock 1=14344, Supplier 1=Digi-Key
C31 C32: library part CAP_47pF_100V_0805, "CAP CER 47PF 100V NPO 0805", Capacitance=47pF, Case/Package=0805, Case Code (Metric)=2012, Manufacturer 1=Yageo, Manufacturer Part Number 1=AC0805JRNPO0BN470, Max Operating Temperature=125°C, Min Operating Temperature=-55°C, Ratings=AEC-Q200, Supplier Part Number 1=311-3131-1-ND, Tolerance=5%, Voltage Rating=100V, Case Code (Imperial)=0805, ComponentLink1Description=http://www.yageo.com/NewPortal/_en/search/productDocs.jsp?YageoPartNumber=AC0805JRNPO0BN470&src-supplier=Digi-Key, ComponentLink1URL=http://www.yageo.com/NewPortal/_en/search/productDocs.jsp?YageoPartNumber=AC0805JRNPO0BN470&src-supplier=Digi-Key, Mount="Surface Mount", Packaging="Tape and Reel", Pricing 1="1=0.19000, 10=0.12600, 100=0.06400, 500=0.04376, 1000=0.03871 (USD)", RoHS=No, Stock 1=2091, Supplier 1=Digi-Key
C33 C34: library part CAP_1uF_25V_0805, "CAP CER 1UF 25V X7R 0805", Capacitance=1uF, Case/Package=0805, Case Code (Metric)=2012, Dielectric=X7R, Manufacturer 1=Murata, Manufacturer Part Number 1=GCM21BR71E105KA56K, Max Operating Temperature=125°C, Min Operating Temperature=-55°C, Package Quantity=10000, Ratings=AEC-Q200, Supplier Part Number 1=490-14743-1-ND, Tolerance=10%, Voltage Rating=25V, Case Code (Imperial)=0805, ComponentLink1Description=https://datasheet.ciiva.com/169/product-169236.pdf?src-supplier=Digi-Key, ComponentLink1URL=https://datasheet.ciiva.com/169/product-169236.pdf?src-supplier=Digi-Key, ComponentLink2Description=https://datasheet.ciiva.com/11616/product-11616618.pdf?src-supplier=Avnet, ComponentLink2URL=https://datasheet.ciiva.com/11616/product-11616618.pdf?src-supplier=Avnet, Depth=1.25mm, Height=1.25mm, Length=2mm, Mount="Surface Mount", Packaging="Tape and Reel", Pricing 1="1=0.34000, 10=0.23600, 100=0.13360, 500=0.09432, 1000=0.08254, 2500=0.07861, 5000=0.07271 (USD)", Radiation Hardening=No, RoHS=Yes, Stock 1=31473, Supplier 1=Digi-Key, Termination=SMD/SMT, Thickness=0.055inch, Voltage Rating (DC)=25V, Width=0.049inch
D1: "LED RGB DIFFUSED 4PLCC SMD", Case/Package=PLCC, Color=Blue,Green,Red, Forward Voltage=3.1V, Lens Color=White, Manufacturer 1=Broadcom, Manufacturer Part Number 1=ASMB-MTB1-0A3A2, Supplier Part Number 1=516-3280-1-ND, Test Current=20mA, ComponentLink1Description=http://www.farnell.com/datasheets/2111106.pdf?src-supplier=Farnell, ComponentLink1URL=http://www.farnell.com/datasheets/2111106.pdf?src-supplier=Farnell, ComponentLink2Description=https://docs.broadcom.com/docs/AV02-4194EN?src-supplier=Digi-Key, ComponentLink2URL=https://docs.broadcom.com/docs/AV02-4194EN?src-supplier=Digi-Key, ComponentLink3Description=http://www.farnell.com/datasheets/1801564.pdf?src-supplier=Element14, ComponentLink3URL=http://www.farnell.com/datasheets/1801564.pdf?src-supplier=Element14, ComponentLink4Description=http://www.farnell.com/datasheets/2111106.pdf?src-supplier=Newark, ComponentLink4URL=http://www.farnell.com/datasheets/2111106.pdf?src-supplier=Newark, Dominant Wavelength=470nm, Height=1.9mm, Length=3.2mm, Lens Style=Round, Lens Transparency=Diffused, Luminous Intensity=350mcd, Mount="Surface Mount", Number of Pins=4, Packaging="Cut Tape", Pricing 1="1=0.60000, 10=0.47100, 100=0.30210, 500=0.25980, 1000=0.20059 (USD)", REACH SVHC="No SVHC", RoHS=Yes, Stock 1=142531, Supplier 1=Digi-Key, Viewing Angle=115°, Width=2.8mm
D2 D4 D8: library part DIO_LED_G, "LED GREEN DIFFUSED 0805 SMD", Forward Voltage Drop=2.2V, Manufacturer 1=OSRAM, Package="0805 (2012 Metric)", Supplier Part Number 1=475-1410-1-ND, Manufacturer Part Number 1="LG R971-KN-1", Mount="Surface Mount", Supplier 1=Digi-Key
D3: library part DIO_LED_R, "LED RED DIFFUSED 0805 SMD", Forward Voltage Drop=2V, Manufacturer 1=OSRAM, Package="0805 (2012 Metric)", Supplier Part Number 1=475-1278-1-ND, Manufacturer Part Number 1="LS R976-NR-1", Mount="Surface Mount", Supplier 1=Digi-Key
D5: library part DIO_LED_Y, "LED YELLOW DIFFUSED 0805 SMD", Forward Voltage Drop=2.2V, Manufacturer 1=OSRAM, Package="0805 (2012 Metric)", Supplier Part Number 1=475-2560-1-ND, Manufacturer Part Number 1="LY R976-PS-36", Mount="Surface Mount", Supplier 1=Digi-Key
D6: "ESD Suppressor Diode Arrays 8KV 3-Pin SOT-23 T/R", Breakdown Voltage=7V, Capacitance=0.9pF, Case/Package=SOT-23, Clamping Voltage=8V, Current Rating=100nA, Manufacturer="Texas Instruments", Manufacturer Part Number=TPD2E009DBZR, Max Operating Temperature=85°C, Max Power Dissipation=45W, Min Breakdown Voltage=9V, Min Operating Temperature=-40°C, Operating Supply Voltage=6V, Package Quantity=1, Peak Pulse Current=1A, Power Line Protection=Yes, Reverse Standoff Voltage=5.5V, Supplier Part Number 1=296-24657-1-ND, Category="Interface ICs", ComponentLink1Description=https://datasheet.ciiva.com/353/tpd2e009-353266.pdf?src-supplier=Digi-Key, ComponentLink1URL=https://datasheet.ciiva.com/353/tpd2e009-353266.pdf?src-supplier=Digi-Key, ComponentLink2Description=https://datasheet.ciiva.com/15134/getdatasheetpartid-243395-15134537.pdf?src-supplier=Verical, ComponentLink2URL=https://datasheet.ciiva.com/15134/getdatasheetpartid-243395-15134537.pdf?src-supplier=Verical, ComponentLink3Description=https://datasheet.ciiva.com/4479/slvs953a-121037-4479453.pdf?src-supplier=Mouser, ComponentLink3URL=https://datasheet.ciiva.com/4479/slvs953a-121037-4479453.pdf?src-supplier=Mouser, ComponentLink4Description=https://datasheet.ciiva.com/353/tpd2e009-353268.pdf?src-supplier=Digi-Key, ComponentLink4URL=https://datasheet.ciiva.com/353/tpd2e009-353268.pdf?src-supplier=Digi-Key, ComponentLink5Description=https://datasheet.ciiva.com/353/tpd2e009-353267.pdf?src-supplier=Digi-Key, ComponentLink5URL=https://datasheet.ciiva.com/353/tpd2e009-353267.pdf?src-supplier=Digi-Key, ComponentLink6Description=https://datasheet.ciiva.com/46384/1707898-46384524.pdf?src-supplier=Element14, ComponentLink6URL=https://datasheet.ciiva.com/46384/1707898-46384524.pdf?src-supplier=Element14, Depth=1.3mm, Direction=Unidirectional, Element Configuration=Dual, Height=1mm, Interface=LVDS,PCIe,SATA, Lead Free="Lead Free", Length=2.92mm, Number of Bidirectional Channels=2, Number of Channels=2, Number of Pins=3, Packaging="Tape and Reel", Peak Pulse Power=45W, Pricing 1="1=0.56000, 10=0.48000, 25=0.44800, 100=0.33280, 250=0.31616, 500=0.25984, 1000=0.21120 (USD)", Radiation Hardening=No, REACH SVHC="No SVHC", RoHS=Yes, Stock 1=98615, Supplier 1=Digi-Key, Termination=SMD/SMT, Width=1.3mm, Working Voltage=5.5V
D7: "TVS DIODE 5V 9.2V DO214AA", Breakdown Voltage=7.25V, Case/Package=SMB, Clamping Voltage=9.2V, Leakage Current=800uA, Manufacturer 1=Bourns, Manufacturer Part Number 1=SMBJ5.0A, Max Operating Temperature=150°C, Max Power Dissipation=600W, Max Surge Current=100A, Min Breakdown Voltage=6.4V, Min Operating Temperature=-55°C, Operating Supply Voltage=3.5V, Package Quantity=1, Peak Pulse Current=65.2A, Power Line Protection=No, Reverse Standoff Voltage=5V, Supplier Part Number 1=SMBJ5.0ABCT-ND, Test Current=10mA, ComponentLink1Description=https://datasheet.ciiva.com/25624/0900766b81122151-25624859.pdf?src-supplier=RSComponents, ComponentLink1URL=https://datasheet.ciiva.com/25624/0900766b81122151-25624859.pdf?src-supplier=RSComponents, ComponentLink2Description=https://datasheet.ciiva.com/5749/1677318-5749456.pdf?src-supplier=Farnell, ComponentLink2URL=https://datasheet.ciiva.com/5749/1677318-5749456.pdf?src-supplier=Farnell, ComponentLink3Description=https://datasheet.ciiva.com/334/smbj-334066.pdf?src-supplier=Digi-Key, ComponentLink3URL=https://datasheet.ciiva.com/334/smbj-334066.pdf?src-supplier=Digi-Key, ComponentLink4Description=https://datasheet.ciiva.com/17413/smbj-17413462.pdf?src-supplier=Avnet+Europe, ComponentLink4URL=https://datasheet.ciiva.com/17413/smbj-17413462.pdf?src-supplier=Avnet+Europe, ComponentLink5Description=https://datasheet.ciiva.com/3021/smbj-3021451.pdf?src-supplier=Avnet, ComponentLink5URL=https://datasheet.ciiva.com/3021/smbj-3021451.pdf?src-supplier=Avnet, ComponentLink6Description=https://datasheet.ciiva.com/3021/smbj-3021452.pdf?src-supplier=Avnet, ComponentLink6URL=https://datasheet.ciiva.com/3021/smbj-3021452.pdf?src-supplier=Avnet, ComponentLink8Description=https://datasheet.ciiva.com/30094/smbj-30094061.pdf?src-supplier=Onlinecomponents.com, ComponentLink8URL=https://datasheet.ciiva.com/30094/smbj-30094061.pdf?src-supplier=Onlinecomponents.com, ComponentLink9Description=https://datasheet.ciiva.com/334/smbj-334064.pdf?src-supplier=Digi-Key, ComponentLink9URL=https://datasheet.ciiva.com/334/smbj-334064.pdf?src-supplier=Digi-Key, ComponentLink10Description=https://datasheet.ciiva.com/334/smbj-334065.pdf?src-supplier=Digi-Key, ComponentLink10URL=https://datasheet.ciiva.com/334/smbj-334065.pdf?src-supplier=Digi-Key, ComponentLink11Description=https://datasheet.ciiva.com/4510/smbj-51809-4510005.pdf?src-supplier=Mouser, ComponentLink11URL=https://datasheet.ciiva.com/4510/smbj-51809-4510005.pdf?src-supplier=Mouser, ComponentLink12Description=https://datasheet.ciiva.com/8031/1677318-8031160.pdf?src-supplier=Element14, ComponentLink12URL=https://datasheet.ciiva.com/8031/1677318-8031160.pdf?src-supplier=Element14, ComponentLink13Description=https://datasheet.ciiva.com/48712/001056320-da-01-en-tvs-diode-smbj5-0a-do-214aa-bou-48712572.pdf?src-supplier=Conrad, ComponentLink13URL=https://datasheet.ciiva.com/48712/001056320-da-01-en-tvs-diode-smbj5-0a-do-214aa-bou-48712572.pdf?src-supplier=Conrad, Composition=Zener, Direction=Unidirectional, Element Configuration=Single, ESD Protection=Yes, Height=2.42mm, Length=4.57mm, Max Breakdown Voltage=7.25V, Max Reverse Leakage Current=800uA, Mount="Surface Mount", Number of Channels=1, Number of Elements=1, Number of Pins=2, Number of Unidirectional Channels=1, Packaging="Tape and Reel", Peak Pulse Power=600W, Polarity=Unidirectional, Pricing 1="1=0.39000, 10=0.29300, 25=0.26440, 100=0.13950, 250=0.13804, 500=0.12362, 1000=0.09620 (USD)", Radiation Hardening=No, REACH SVHC="No SVHC", Reverse Breakdown Voltage=6.4V, RoHS=Yes, Stock 1=3797, Supplier 1=Digi-Key, Termination=SMD/SMT, Width=3.94mm
F1: "FUSE SMD 1.25A 63V", Case/Package=1206, Case Code (Metric)=3216, Current Rating=1.25A, DC Cold Resistance=59mR, Manufacturer 1=Littelfuse, Manufacturer Part Number 1=04661.25NRHF, Max Operating Temperature=90°C, Min Operating Temperature=-55°C, Supplier Part Number 1=F11418CT-ND, Voltage Rating (AC)=63V, Approvals=UL,CSA, Case Code (Imperial)=1206, ComponentLink1Description=https://www.littelfuse.com/~/media/electronics/datasheets/fuses/littelfuse_fuse_466_datasheet.pdf.pdf?src-supplier=Digi-Key, ComponentLink1URL=https://www.littelfuse.com/~/media/electronics/datasheets/fuses/littelfuse_fuse_466_datasheet.pdf.pdf?src-supplier=Digi-Key, Fuse Type="Board Mount (Cartridge Style Excluded)", Mount="Surface Mount", Packaging="Tape and Reel", Pricing 1="1=0.84000, 5=0.81200, 10=0.78700, 50=0.66180, 100=0.54930, 250=0.49940, 500=0.42450, 1000=0.37455 (USD)", RoHS=No, Stock 1=5020, Supplier 1=Digi-Key, Voltage Rating (DC)=63V
J1: "JOYSTICK 10K OHM 2 AXIS TH", Manufacturer 1="Adafruit Industries", Manufacturer Part Number 1=2765, Resistance=10kR, Supplier Part Number 1=1528-1730-ND, ComponentLink1Description=https://media.digikey.com/pdf/Data%20Sheets/Adafruit%20PDFs/2765_Web.pdf?src-supplier=Digi-Key, ComponentLink1URL=https://media.digikey.com/pdf/Data%20Sheets/Adafruit%20PDFs/2765_Web.pdf?src-supplier=Digi-Key, Height=0.472inch, Length=0.707inch, Mount="Through Hole", Packaging=Bulk, Pricing 1="1=2.50000 (USD)", RoHS=Yes, Stock 1=351, Supplier 1=Digi-Key, Width=0.697inch
J2: "JOYSTICK 10K OHM 2 AXIS TH", Manufacturer 1=SparkFun, Manufacturer Part Number 1=COM-09032, Supplier Part Number 1=1568-1526-ND, ComponentLink1Description=https://media.digikey.com/pdf/Data%20Sheets/Sparkfun%20PDFs/COM-09032_Web.pdf?src-supplier=Digi-Key, ComponentLink1URL=https://media.digikey.com/pdf/Data%20Sheets/Sparkfun%20PDFs/COM-09032_Web.pdf?src-supplier=Digi-Key, Pricing 1="1=3.95000 (USD)", RoHS=No, Stock 1=1039, Supplier 1=Digi-Key
J3: library part CMP-1502-03253-1, "Micro USB 2.0 Type B Receptacle WR-COM, Horizontal, SMT, with Pads and Pegs", Contact Resistance=30mOhm, Manufacturer="Wurth Elektronik", Operating Temperature=-40to105degC, Rated Current=1A, Working Voltage=30VAC, Connector Type=MicroUSB2.0TypeB, Datasheet URL=https://katalog.we-online.de/em/datasheet/629105136821.pdf, Gender=Receptacle, Manufacturer URL=http://www.we-online.de, Mounting Technology=SMT, Orientation=Horizontal, Package Reference=629105136821, Packaging=TapeandReel, Part Number=629105136821, Publisher=WurthElektronik
J4: "2.5 x 6.5 mm, 2.5 A, Horizontal, Through Hole, Tapered Pins, Dc Power Jack Connector", Color=Black, Current Rating=2.5A, Flammability Rating="UL94 V-0", Insulation Resistance=100MR, Manufacturer 1=CUI, Max Operating Temperature=85°C, Min Operating Temperature=-25°C, Package Quantity=280, Supplier Part Number 1=CP-102B-ND, Voltage Rating=24V, ComponentLink1Description=http://www.mouser.com/ds/2/670/PJ-102B-524146.pdf?src-supplier=Mouser, ComponentLink1URL=http://www.mouser.com/ds/2/670/PJ-102B-524146.pdf?src-supplier=Mouser, ComponentLink2Description=https://www.cui.com/product/resource/digikeypdf/pj-102b.pdf?src-supplier=Digi-Key, ComponentLink2URL=https://www.cui.com/product/resource/digikeypdf/pj-102b.pdf?src-supplier=Digi-Key, ComponentLink3Description=http://www.cui.com/Product/Resource/FuturePDF/PJ-102B.pdf?src-supplier=Future+Electronics, ComponentLink3URL=http://www.cui.com/Product/Resource/FuturePDF/PJ-102B.pdf?src-supplier=Future+Electronics, Connector Type=Jack, Contact Gender=Male, Contact Material=Copper, Contact Plating=Nickel, Diameter=2.5mm, Gender=Male, Housing Color=Black, Housing Material=Thermoplastic, Lead Free="Lead Free", Manufacturer Part Number 1=PJ-102B, Mount="Through Hole", Number of Conductors=2, Orientation=Horizontal, Packaging=Bulk, Pricing 1="1=0.64000, 10=0.60000, 25=0.54000, 50=0.48000, 100=0.46000, 250=0.42000, 500=0.40000, 1000=0.33000, 2500=0.30000 (USD)", RoHS=Yes, Shielding=Unshielded, Stock 1=71721, Supplier 1=Digi-Key, Termination="Through Hole"
J5: "CONN HEADER VERT 8POS 2.54MM", Manufacturer 1="Harwin Inc.", Manufacturer Part Number 1=M20-9980445, Supplier Part Number 1=952-2122-ND, Mount="Through Hole", Supplier 1=Digi-Key
MH1 MH2 MH3 MH4: "6cm x 6cm"
R1 R3: library part RES_100O_0805, "RES SMD 100 OHM 1% 1/8W 0805", Case Code (Imperial)=0805, Case Code (Metric)=2012, Manufacturer 1=Yageo, Manufacturer Part Number 1=RC0805FR-07100RL, Package="0805 (2012 Metric)", Power Rating=125mW, Supplier Part Number 1=311-100CRCT-ND, Mount="Surface Mount", Supplier 1=Digi-Key
R2 R4: library part RES_20O_0805, "RES SMD 20 OHM 1% 1/8W 0805", Case Code (Imperial)=0805, Case Code (Metric)=2012, Manufacturer 1=Yageo, Manufacturer Part Number 1=RC0805FR-0720RL, Max Operating Temperature=155°C, Min Operating Temperature=-55°C, Package="0805 (2012 Metric)", Power Rating=125mW, Resistance=20, Supplier Part Number 1=311-20.0CRCT-ND, Tolerance=1%, Supplier 1=Digi-Key, Termination=SMD/SMT
R5 R6 R7 R8 R9 R10 R11 R12 R13 R14 R15 R16 R17 R18 R19 R20 R21 R22 R23 R24 R25 R26 R27 R28 R29 R35: library part RES_10kO_0805, "RES SMD 10K OHM 1% 1/8W 0805", Case Code (Imperial)=0805, Case Code (Metric)=2012, Manufacturer 1=Yageo, Manufacturer Part Number 1=RC0805FR-0710KL, Max Operating Temperature=155°C, Min Operating Temperature=-55°C, Package="0805 (2012 Metric)", Power Rating=125mW, Resistance=10K, Supplier Part Number 1=311-10.0KCRCT-ND, Tolerance=1%, Supplier 1=Digi-Key, Termination=SMD/SMT
R30 R34: library part RES_27O_0805, "RES SMD 27 OHM 1% 1/8W 0805", Case/Package=0805, Case Code (Metric)=2012, Manufacturer 1=Yageo, Manufacturer Part Number 1=RC0805FR-0727RL, Max Operating Temperature=155°C, Min Operating Temperature=-55°C, Power Rating=125mW, Resistance=27O, Supplier Part Number 1=311-27.0CRCT-ND, Temperature Coefficient=100ppm/°C, Tolerance=1%, Voltage Rating=150V, Case Code (Imperial)=0805, ComponentLink1Description=https://datasheet.ciiva.com/12561/rc0805-257173-12561222.pdf?src-supplier=Mouser, ComponentLink1URL=https://datasheet.ciiva.com/12561/rc0805-257173-12561222.pdf?src-supplier=Mouser, ComponentLink2Description=https://datasheet.ciiva.com/7941/444164-7941752.pdf?src-supplier=Element14, ComponentLink2URL=https://datasheet.ciiva.com/7941/444164-7941752.pdf?src-supplier=Element14, ComponentLink3Description=https://datasheet.ciiva.com/7941/444164-7941753.pdf?src-supplier=Element14, ComponentLink3URL=https://datasheet.ciiva.com/7941/444164-7941753.pdf?src-supplier=Element14, Composition="Thick Film", Depth=1.25mm, Height=0.5mm, Lead Free="Lead Free", Length=2mm, Military Standard=Not, Number of Terminations=2, Packaging="Tape and Reel", Pricing 1="1=0.10000, 10=0.04000, 100=0.01630, 1000=0.00731, 2500=0.00635 (USD)", REACH SVHC=Unknown, RoHS=Yes, Stock 1=345388, Supplier 1=Digi-Key, Termination=SMD/SMT, Width=1.25mm, Working Voltage=150V
R31 R32 R33: library part RES_1kO_0805, "RES SMD 1K OHM 1% 1/8W 0805", Case/Package=0805, Case Code (Metric)=2012, Manufacturer 1=Yageo, Manufacturer Part Number 1=RC0805FR-071KL, Max Operating Temperature=155°C, Max Power Dissipation=125mW, Min Operating Temperature=-55°C, Package="0805 (2012 Metric)", Package Quantity=1000, Resistance=1K, Supplier Part Number 1=311-1.00KCRCT-ND, Temperature Coefficient=25ppm/°C, Tolerance=1%, Voltage Rating=150V, Case Code (Imperial)=0805, ComponentLink1Description=https://datasheet.ciiva.com/9003/tnpw-e3-9003481.pdf?src-supplier=Avnet, ComponentLink1URL=https://datasheet.ciiva.com/9003/tnpw-e3-9003481.pdf?src-supplier=Avnet, ComponentLink2Description=https://datasheet.ciiva.com/9003/tnpw-e3-9003543.pdf?src-supplier=Avnet, ComponentLink2URL=https://datasheet.ciiva.com/9003/tnpw-e3-9003543.pdf?src-supplier=Avnet, Composition="Thin Film", Contact Plating=Tin, Depth=1.25mm, Features="Moisture Resistant,Automotive AEC-Q200,Anti-Sulfur", Height=0.022inch, Lead Free="Lead Free", Length=2mm, Military Standard=Not, Mount="Surface Mount", Number of Pins=2, Number of Terminations=2, Packaging="Tape and Reel", Power Rating=125mW, Radiation Hardening=No, REACH SVHC=Unknown, RoHS=Yes, Supplier 1=Digi-Key, Termination=SMD/SMT, Voltage Rating (DC)=150V, Weight=0.000194oz, Width=0.049inch
R36: library part RES_120O_0805, "RES SMD 120 OHM 1% 1/8W 0805", Case Code (Imperial)=0805, Case Code (Metric)=2012, Manufacturer 1=Vishay, Manufacturer Part Number 1=CRCW0805120RFKEA, Package="0805 (2012 Metric)", Power Rating=125mW, Resistance=120O, Supplier Part Number 1=541-120CCT-ND, Voltage Rating=150V, ComponentLink1Description=https://datasheet.ciiva.com/11810/0900766b80d98b26-11810477.pdf?src-supplier=RSComponents, ComponentLink1URL=https://datasheet.ciiva.com/11810/0900766b80d98b26-11810477.pdf?src-supplier=RSComponents, ComponentLink2Description=https://datasheet.ciiva.com/3258/dcrcwe3-3258069.pdf?src-supplier=Avnet, ComponentLink2URL=https://datasheet.ciiva.com/3258/dcrcwe3-3258069.pdf?src-supplier=Avnet, ComponentLink3Description=https://datasheet.ciiva.com/26317/fld-crcw-e3-data-en-26317334.pdf?src-supplier=Distrelec, ComponentLink3URL=https://datasheet.ciiva.com/26317/fld-crcw-e3-data-en-26317334.pdf?src-supplier=Distrelec, ComponentLink4Description=https://datasheet.ciiva.com/2467/dcrcwe3-2467512.pdf?src-supplier=Digi-Key, ComponentLink4URL=https://datasheet.ciiva.com/2467/dcrcwe3-2467512.pdf?src-supplier=Digi-Key, ComponentLink5Description=https://datasheet.ciiva.com/2467/dcrcwe3-2467514.pdf?src-supplier=Digi-Key, ComponentLink5URL=https://datasheet.ciiva.com/2467/dcrcwe3-2467514.pdf?src-supplier=Digi-Key, ComponentLink6Description=https://datasheet.ciiva.com/16211/dcrcwe3-16211931.pdf?src-supplier=Future+Electronics, ComponentLink6URL=https://datasheet.ciiva.com/16211/dcrcwe3-16211931.pdf?src-supplier=Future+Electronics, ComponentLink7Description=https://datasheet.ciiva.com/2467/dcrcwe3-2467513.pdf?src-supplier=Digi-Key, ComponentLink7URL=https://datasheet.ciiva.com/2467/dcrcwe3-2467513.pdf?src-supplier=Digi-Key, ComponentLink8Description=https://datasheet.ciiva.com/16852/dcrcwe3-16852841.pdf?src-supplier=Avnet+Europe, ComponentLink8URL=https://datasheet.ciiva.com/16852/dcrcwe3-16852841.pdf?src-supplier=Avnet+Europe, ComponentLink9Description=https://datasheet.ciiva.com/7777/1697337-7777354.pdf?src-supplier=Element14, ComponentLink9URL=https://datasheet.ciiva.com/7777/1697337-7777354.pdf?src-supplier=Element14, ComponentLink10Description=https://datasheet.ciiva.com/16788/70201119-16788154.pdf?src-supplier=Allied+Electronics, ComponentLink10URL=https://datasheet.ciiva.com/16788/70201119-16788154.pdf?src-supplier=Allied+Electronics, ComponentLink11Description=https://datasheet.ciiva.com/7777/1720486-7777567.pdf?src-supplier=Element14, ComponentLink11URL=https://datasheet.ciiva.com/7777/1720486-7777567.pdf?src-supplier=Element14, Mount="Surface Mount", Supplier 1=Digi-Key
S1 S2: "Tactile Switch (Grey)", Manufacturer 1="Omron Electronics Inc-EMC Div", Manufacturer Part Number 1=B3U-1000P, Supplier Part Number 1=SW1020CT-ND, Mount="Surface Mount", Supplier 1=Digi-Key
S3: "SWITCH TOGGLE SPDT 5A 120V", Current Rating=5A, Manufacturer 1=E-Switch, Manufacturer Part Number 1=100SP1T1B4M2QE, Max Operating Temperature=85°C, Min Operating Temperature=-30°C, Package Quantity=1, Supplier Part Number 1=EG2355-ND, Voltage Rating (AC)=120V, Voltage Rating (DC)=28V, Actuator Length=12.19mm, Actuator Material=Brass,Chrome, Actuator Type="Standard Round", ComponentLink1Description=https://datasheet.ciiva.com/24455/t111597-24455739.pdf?src-supplier=Onlinecomponents.com, ComponentLink1URL=https://datasheet.ciiva.com/24455/t111597-24455739.pdf?src-supplier=Onlinecomponents.com, ComponentLink2Description=https://datasheet.ciiva.com/2905/t111597-2905494.pdf?src-supplier=Digi-Key, ComponentLink2URL=https://datasheet.ciiva.com/2905/t111597-2905494.pdf?src-supplier=Digi-Key, Contact Material=Silver, Contact Plating=Silver, Electrical Life=40000Cycles, Illumination Type=Non-Illuminated,Illuminated, Lead Free="Lead Free", Mount="Through Hole", Orientation=Vertical, Packaging=Bulk, Pricing 1="1=1.99000, 10=1.77900, 25=1.68240, 50=1.60200, 100=1.52950, 250=1.46512, 500=1.36850, 1000=1.30410 (USD)", RoHS=Yes, Stock 1=4845, Supplier 1=Digi-Key, Switch Function=On-On, Termination="PC Pin", Throw Configuration=SPDT
S4: "SWITCH SLIDE SPDT 100MA 30V", Contact Current Rating=100mA, Contact Resistance=20mR, Flammability Rating="UL94 V-0", Insulation Resistance=100MR, Manufacturer 1="NKK Switches", Manufacturer Part Number 1=SS12SDP2, Max Operating Temperature=60°C, Max Voltage Rating (DC)=30V, Min Operating Temperature=-15°C, Package Quantity=1, Supplier Part Number 1=360-2133-ND, Voltage Rating (AC)=28V, Actuator Length=2mm, Actuator Material=Polyamide,Polyacetal, Actuator Type=Standard, Body Material=Polyamide,Polyacetal, ComponentLink1Description=https://datasheet.ciiva.com/19453/1915771-19453348.pdf?src-supplier=Jameco, ComponentLink1URL=https://datasheet.ciiva.com/19453/1915771-19453348.pdf?src-supplier=Jameco, ComponentLink2Description=https://datasheet.ciiva.com/29119/704240-da-01-en-schiebes-spdt-on-on-2x2-oben-bet-silb-29119647.pdf?src-supplier=Conrad, ComponentLink2URL=https://datasheet.ciiva.com/29119/704240-da-01-en-schiebes-spdt-on-on-2x2-oben-bet-silb-29119647.pdf?src-supplier=Conrad, ComponentLink3Description=https://datasheet.ciiva.com/1532/10312-1532339.pdf?src-supplier=Element14, ComponentLink3URL=https://datasheet.ciiva.com/1532/10312-1532339.pdf?src-supplier=Element14, ComponentLink4Description=https://datasheet.ciiva.com/16394/ssnonilluminated-16394655.pdf?src-supplier=Future+Electronics, ComponentLink4URL=https://datasheet.ciiva.com/16394/ssnonilluminated-16394655.pdf?src-supplier=Future+Electronics, Contact Material=Brass,Silver,Bronze, Contact Plating=Silver, Current Rating=100mA, Depth=4mm, Electrical Life=10000Cycles, Height=6.5mm, Housing Material=Thermoplastic, Illumination Type=Non-Illuminated, Lead Free="Lead Free", Length=10.2mm, Max Current Rating=100mA, Mechanical Life=10000Cycles, Mount="PCB,Through Hole", Number of Poles=1, Number of Positions=2, Orientation=Straight, Packaging=Tray, Pricing 1="1=1.56000, 10=1.50000, 25=1.41000, 100=1.21800, 250=1.11000, 500=1.03200, 1000=0.96000, 2500=0.87000, 5000=0.81000 (USD)", REACH SVHC="No SVHC", RoHS=Yes, Stock 1=4905, Supplier 1=Digi-Key, Switch Function=On-On, Switch Travel=2mm, Termination="PC Pins", Throw Configuration=SPDT, Voltage Rating (DC)=30V
S5: library part MOMENTARY_SWITCH_TH, "Momentary Switch (Pushbutton) - SPST", Manufacturer 1=SparkFun, Manufacturer Part Number 1=COM-10302, Package=TACTILE_SWITCH_PTH_12MM, Supplier Part Number 1=1568-1332-ND, ComponentLink1Description=https://www.sparkfun.com/datasheets/Components/Buttons/TSA12110%20TACT%20SWITCH.jpg?src-supplier=Digi-Key, ComponentLink1URL=https://www.sparkfun.com/datasheets/Components/Buttons/TSA12110%20TACT%20SWITCH.jpg?src-supplier=Digi-Key, Mount="Through Hole", Pricing 1="1=5.85000 (USD)", PROD_ID=SWCH-09185, RoHS=No, SF_SKU=COM-09190, Stock 1=32, Supplier 1=Digi-Key, SymbolName_1=SWITCH-MOMENTARY-2, Termination="PC Pin", Throw Configuration=SPST
S6: "SWITCH PUSH SPST-NO 0.1A 32V", Current Rating=100mA, Manufacturer 1="ITT C&K", Manufacturer Part Number 1=D6R50F2LFS, Max Operating Temperature=85°C, Max Voltage Rating (DC)=32V, Min Operating Temperature=-20°C, Operating Force=2.5N, Package Quantity=2500, Supplier Part Number 1=401-1993-ND, Actuator Length=7mm, Actuator Type="Round, Button", ComponentLink1Description=https://datasheet.ciiva.com/2869/d6-31aug10-2869553.pdf?src-supplier=Digi-Key, ComponentLink1URL=https://datasheet.ciiva.com/2869/d6-31aug10-2869553.pdf?src-supplier=Digi-Key, ComponentLink2Description=https://datasheet.ciiva.com/12449/d6-31aug10-19155-12449292.pdf?src-supplier=Mouser, ComponentLink2URL=https://datasheet.ciiva.com/12449/d6-31aug10-19155-12449292.pdf?src-supplier=Mouser, ComponentLink3Description=https://datasheet.ciiva.com/16156/d6-4feb-16156540.pdf?src-supplier=Onlinecomponents.com, ComponentLink3URL=https://datasheet.ciiva.com/16156/d6-4feb-16156540.pdf?src-supplier=Onlinecomponents.com, Contact Plating=Silver, Diameter=12mm, Electrical Life=250000Cycles, Lead Free="Lead Free", Max Current Rating=100mA, Mount="Through Hole", Number of Terminals=4, Orientation=Straight, Packaging=Bulk, Pricing 1="1=1.10000, 10=0.98000, 25=0.93080, 50=0.88520, 100=0.84370, 250=0.80652, 500=0.72380, 1000=0.68244 (USD)", RoHS=Yes, Row Spacing=5mm, Stock 1=4683, Supplier 1=Digi-Key, Switch Function=Off-Mom, Terminal Pitch=5mm, Termination="PC Pin", Throw Configuration=SPST, Voltage Rating (DC)=32V
U1: library part MCU_STM32F446RET6, "ARM Cortex-M4 32-bit MCU+FPU, 512 KB Flash, 128 KB Internal RAM, 50 I/Os, 64-Pin LQFP, -40 to 85 degC, Tray", I/Os (High Current)=50, Operating Frequency(F) (Processor speed) (MHz)=180, Package Description=LQFP64, Package Reference="64-Pin Low-profile Quad Flat Package, Body 10 x 10 mm, Pitch 0.5 mm", Supplier Part Number 1=497-15376-ND, Supply Voltage(Vcc) min (V)=1.7, ComponentLink1Description="Manufacturer URL", ComponentLink1URL=http://www.st.com/, ComponentLink2Description=Datasheet, ComponentLink2URL=http://www.st.com/st-web-ui/static/active/en/resource/technical/document/datasheet/DM00141306.pdf, Core="ARM Cortex-M4", D/A Converter=2, DatasheetVersion="Rev. 6", FLASH Size (Prog) (kB)=512, Internal RAM Size (kB)=128, Mounting Technology="Surface Mount", Packing=Tray, Supplier 1=Digi-Key